# Altium PCB ISL6236 DEMO_PCB.PcbDoc
Units mm, origin at the board's own origin, x right, y up, seen from the top; angles counter-clockwise.
Board outline 50 x 50 mm, 6 copper layers (L1, L2, L3, L4, L5, L6), stack 1.635 mm thick; 41 components, 27 nets, 119 pads, 100 vias.
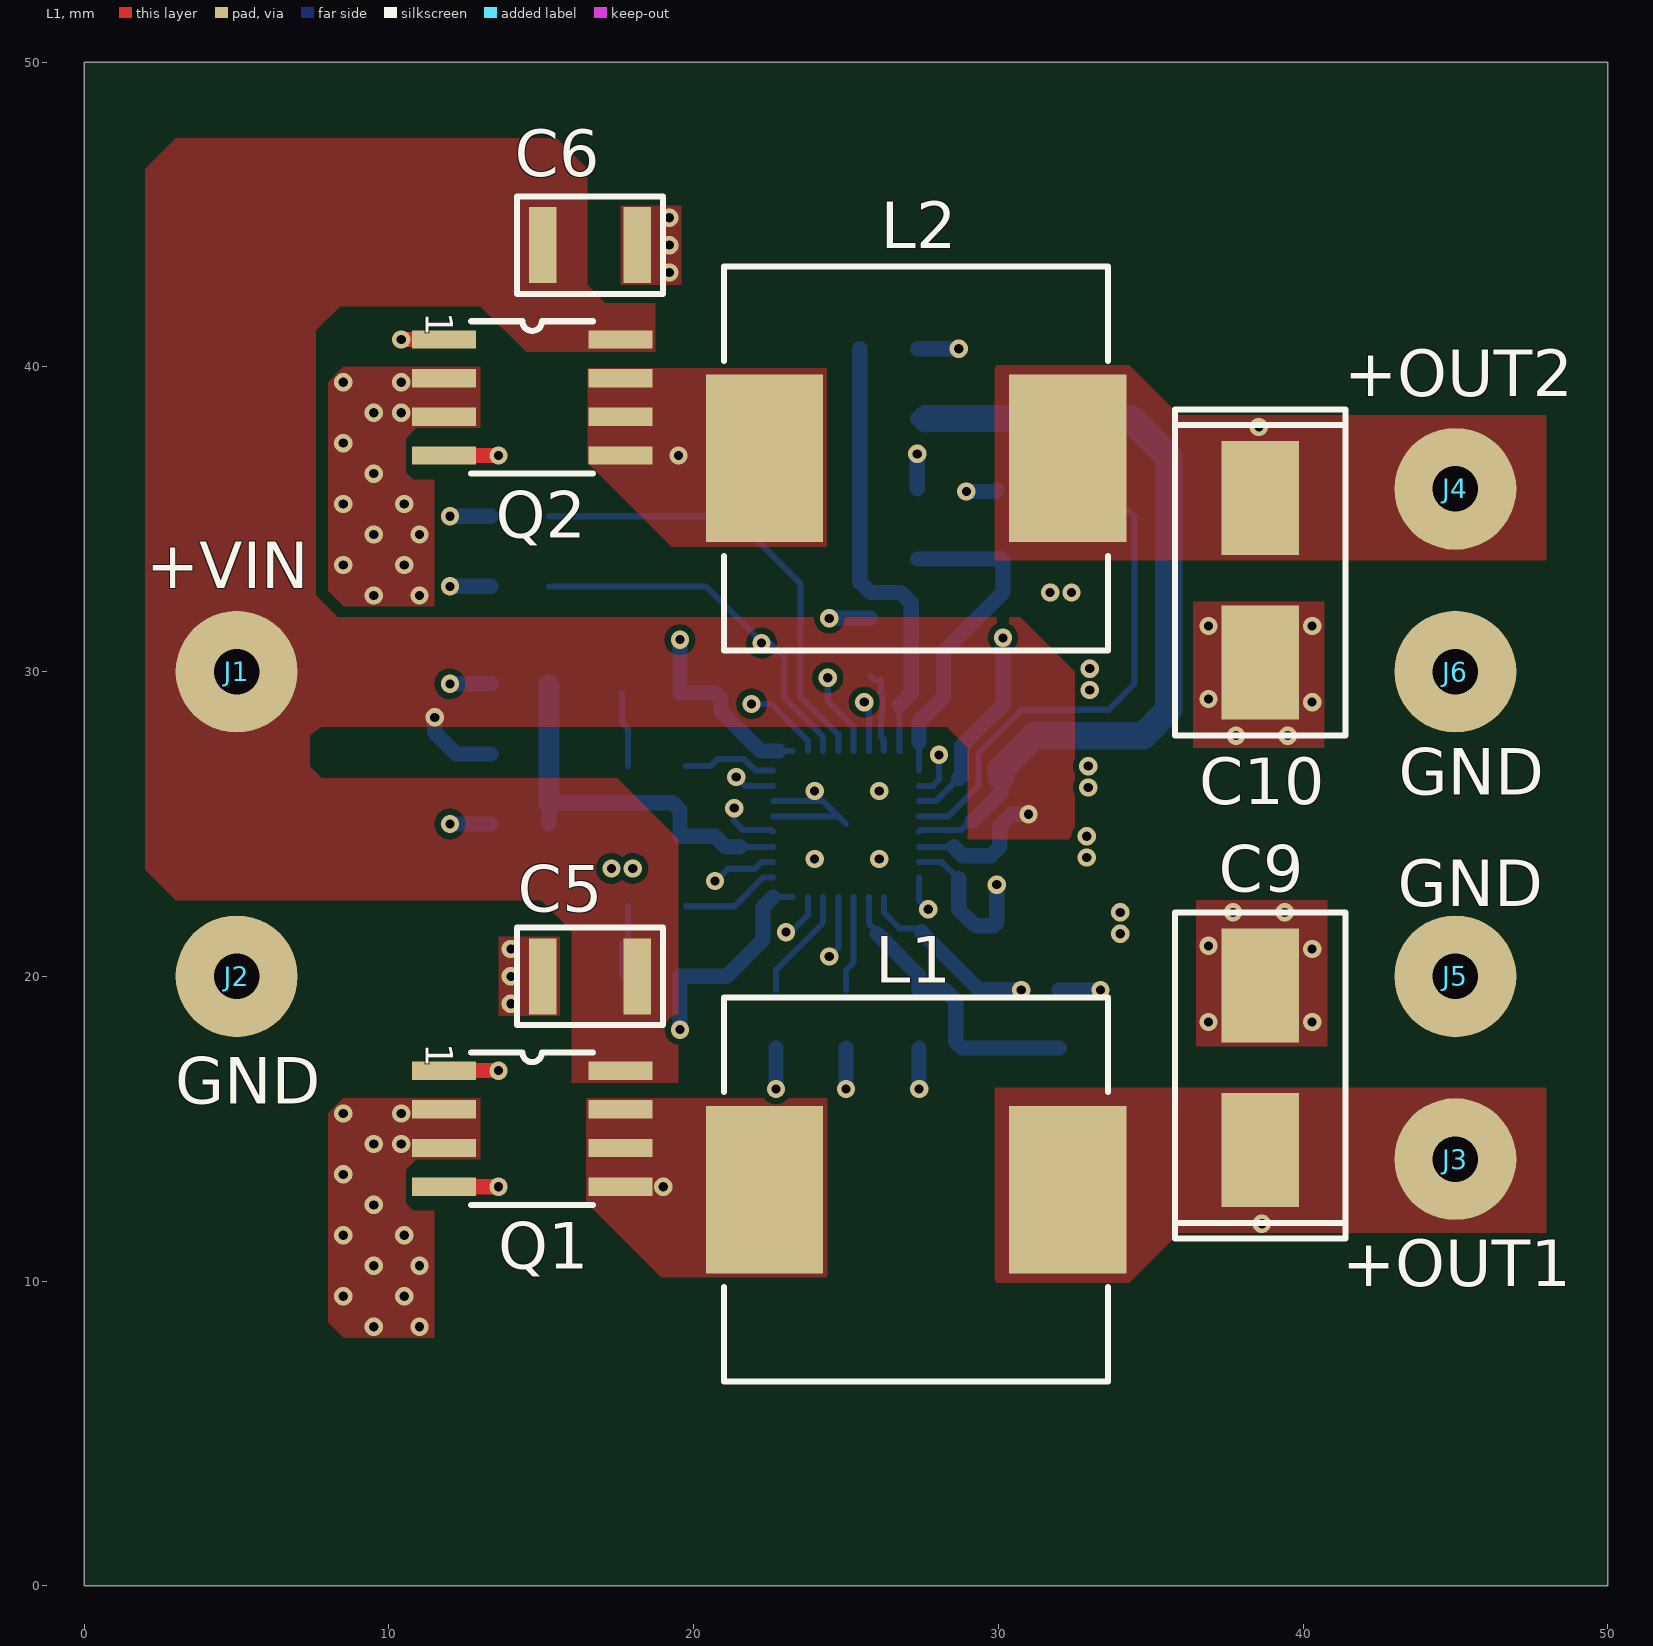
[diagram p0: L1 view]
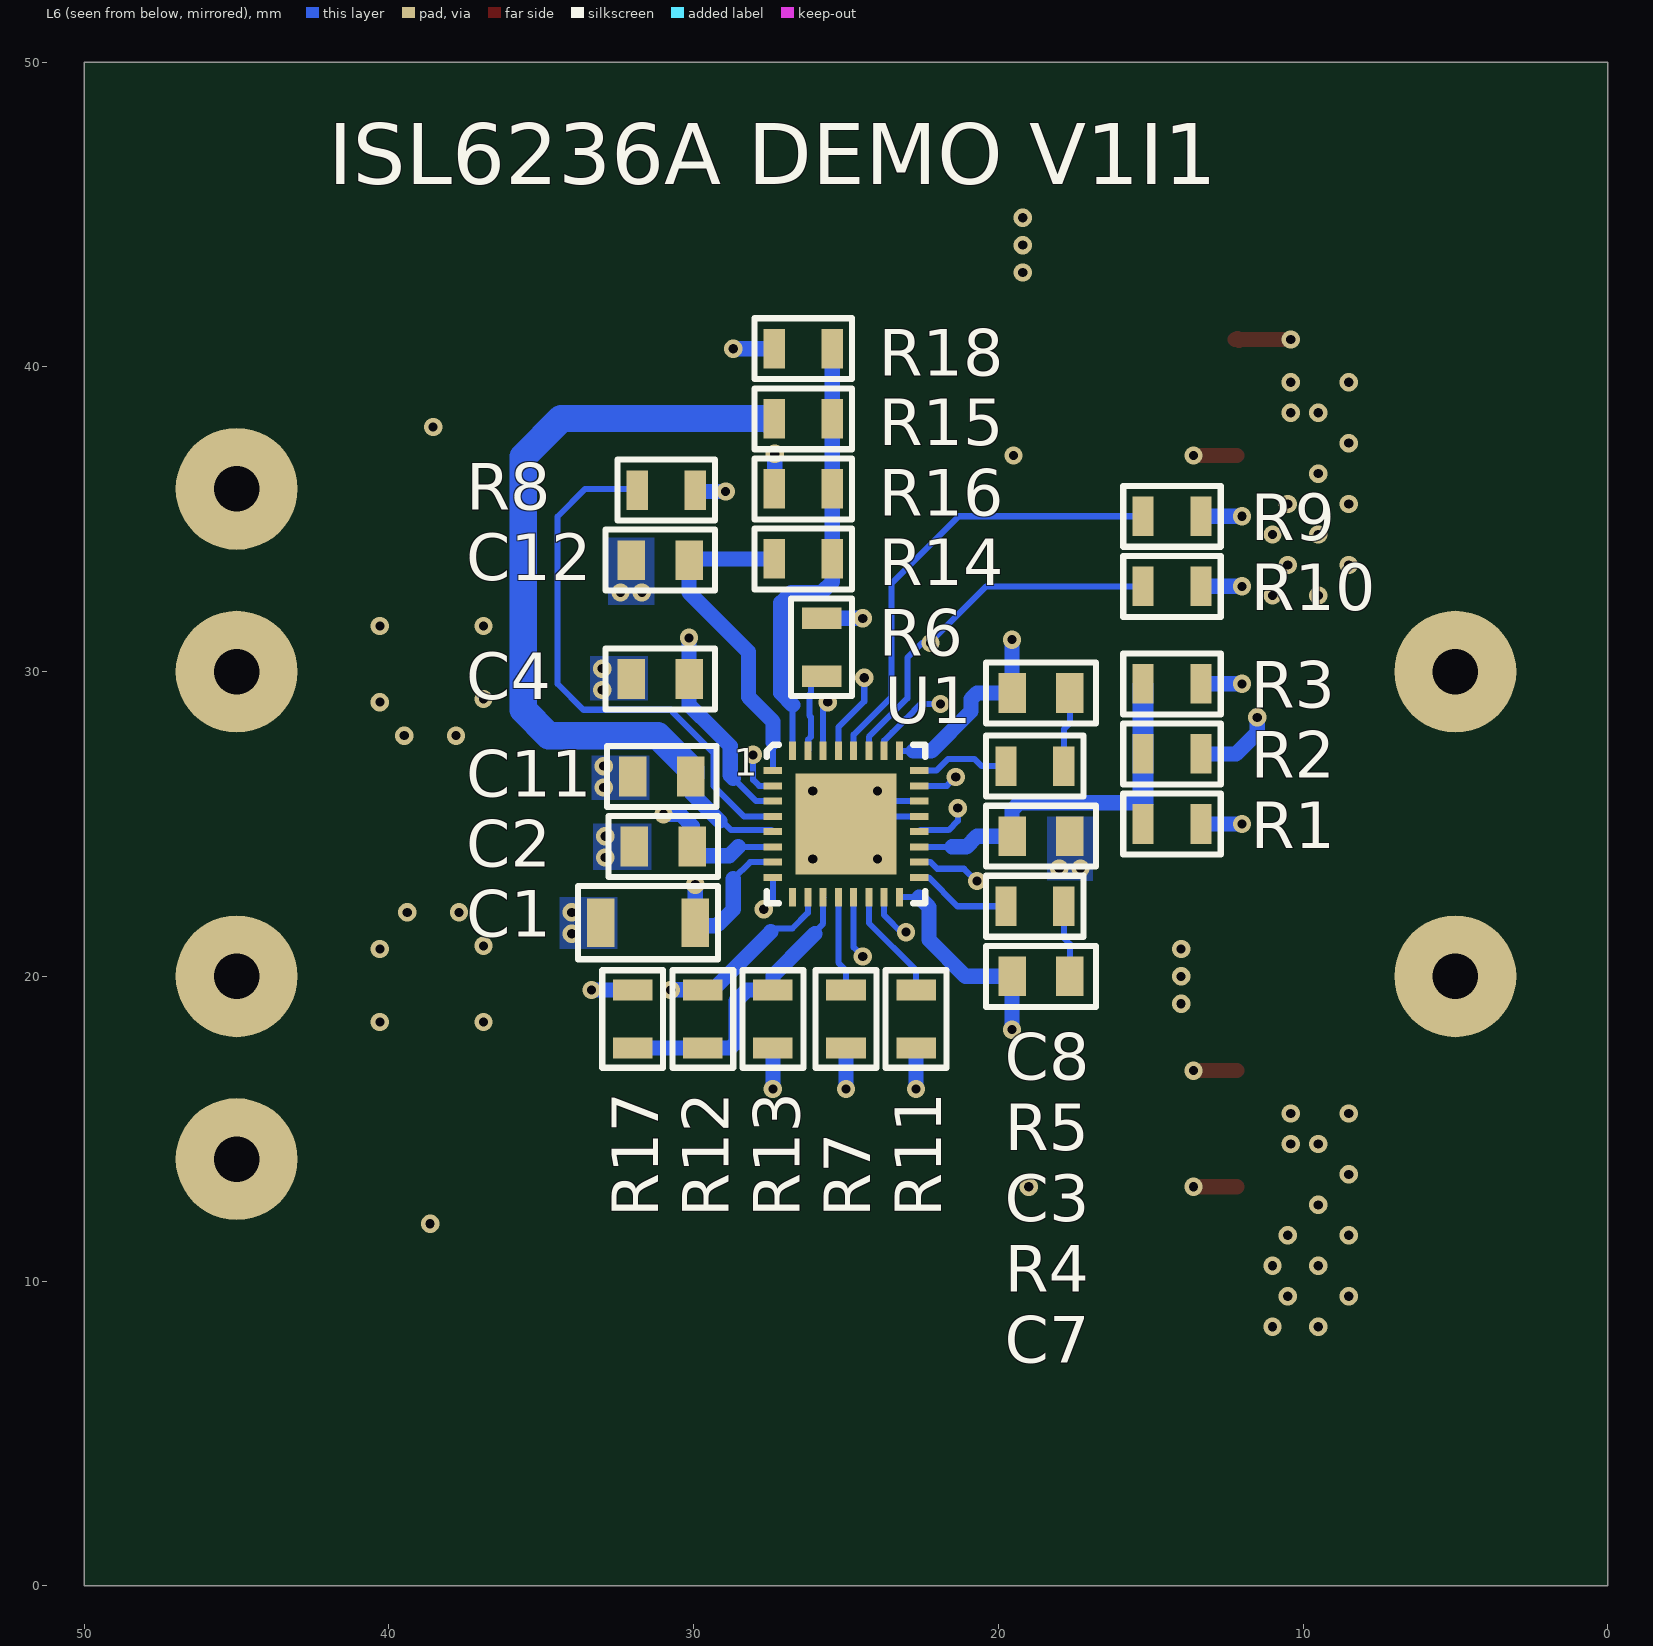
[diagram p1: L6 view, seen from below]
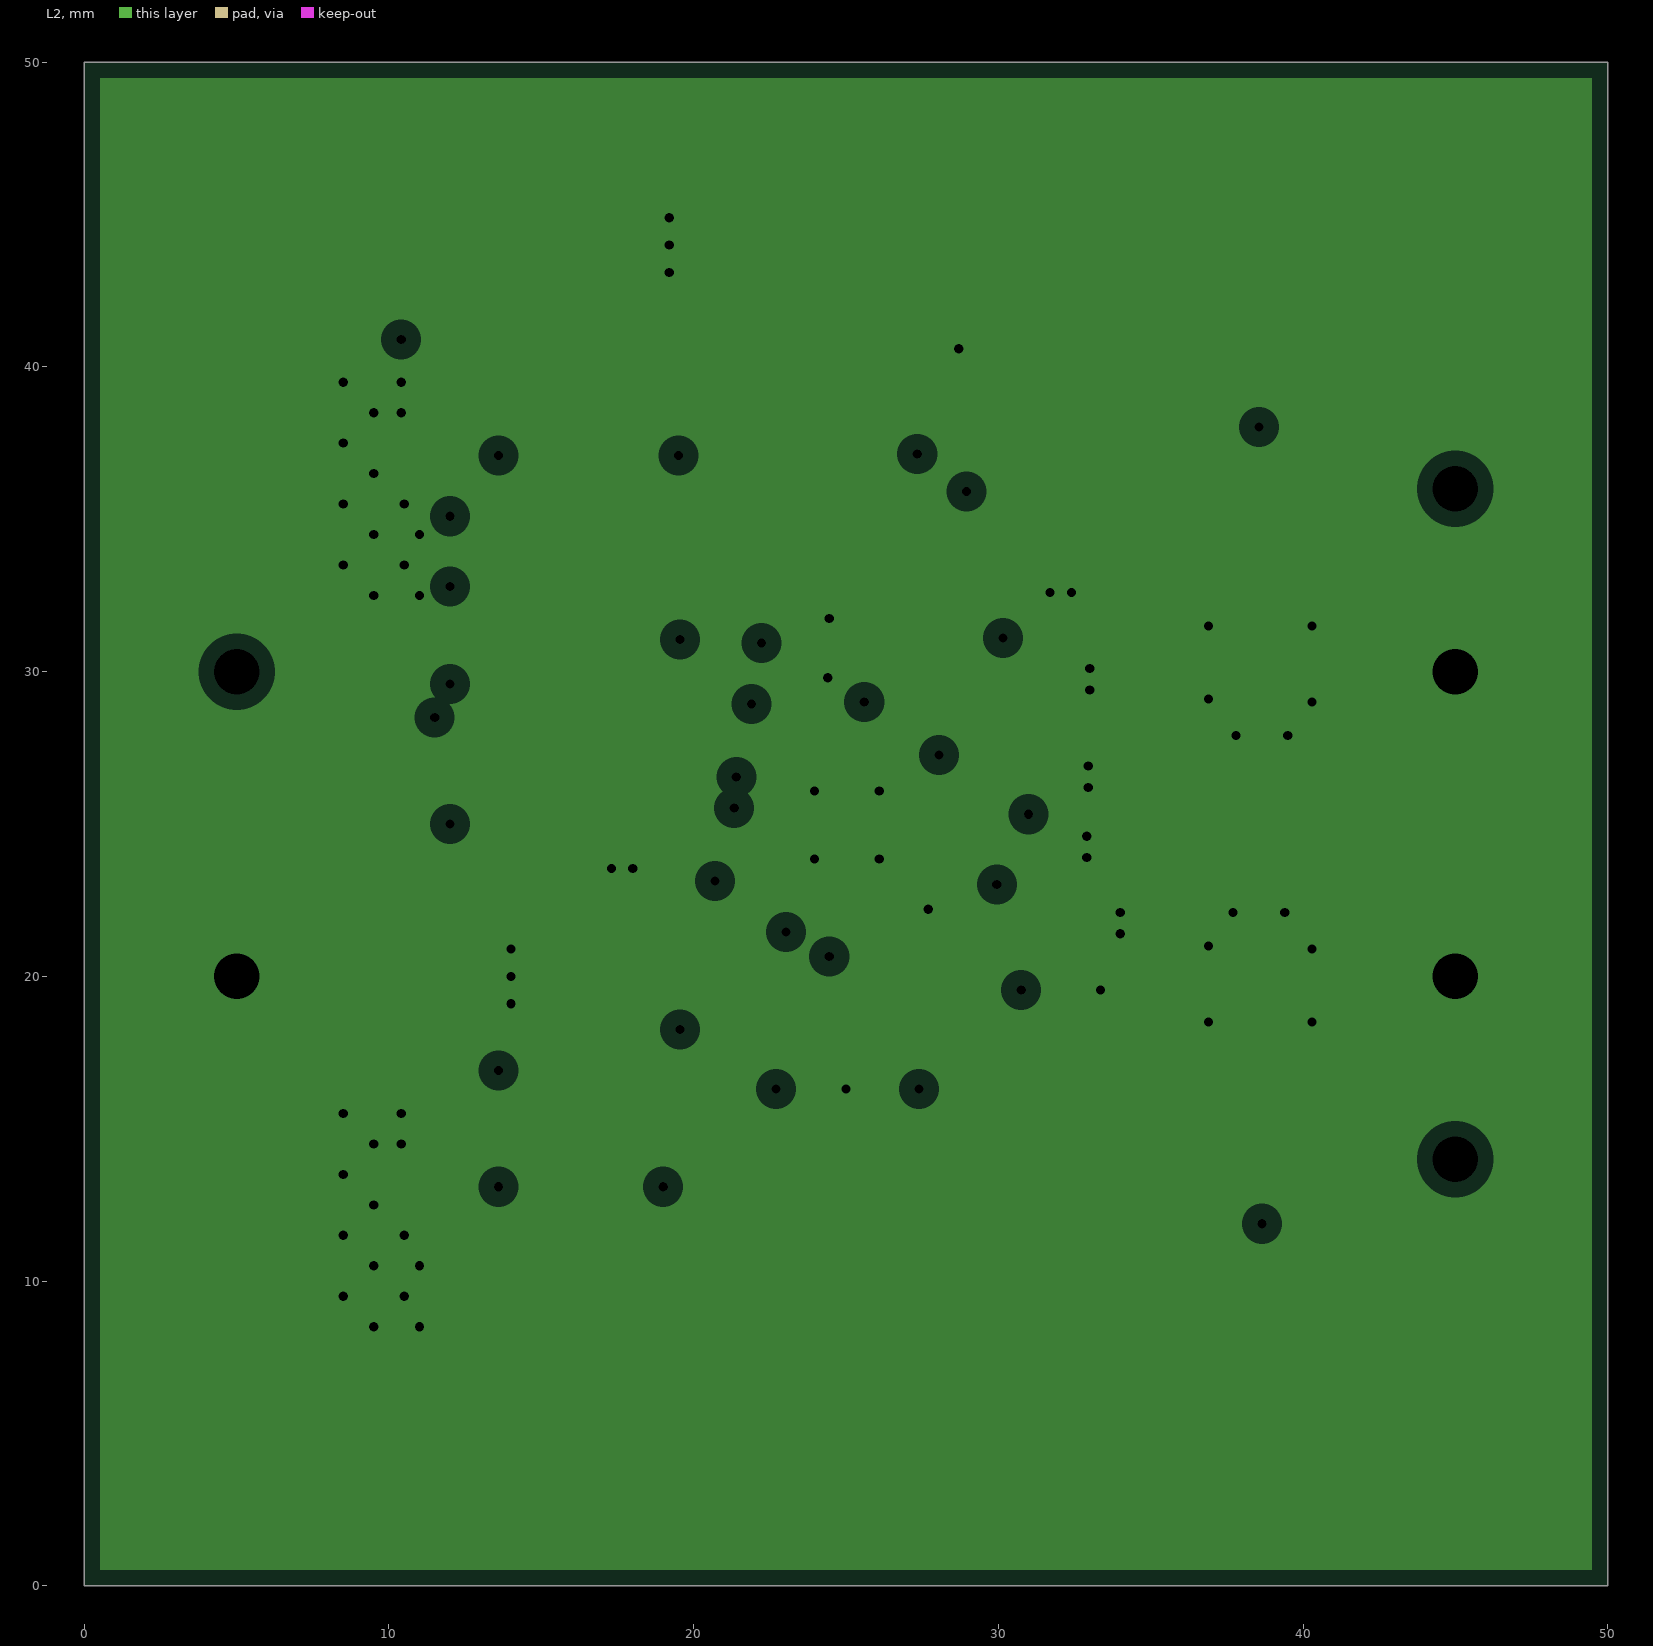
[diagram p2: L2, clearances drawn from the general rule]
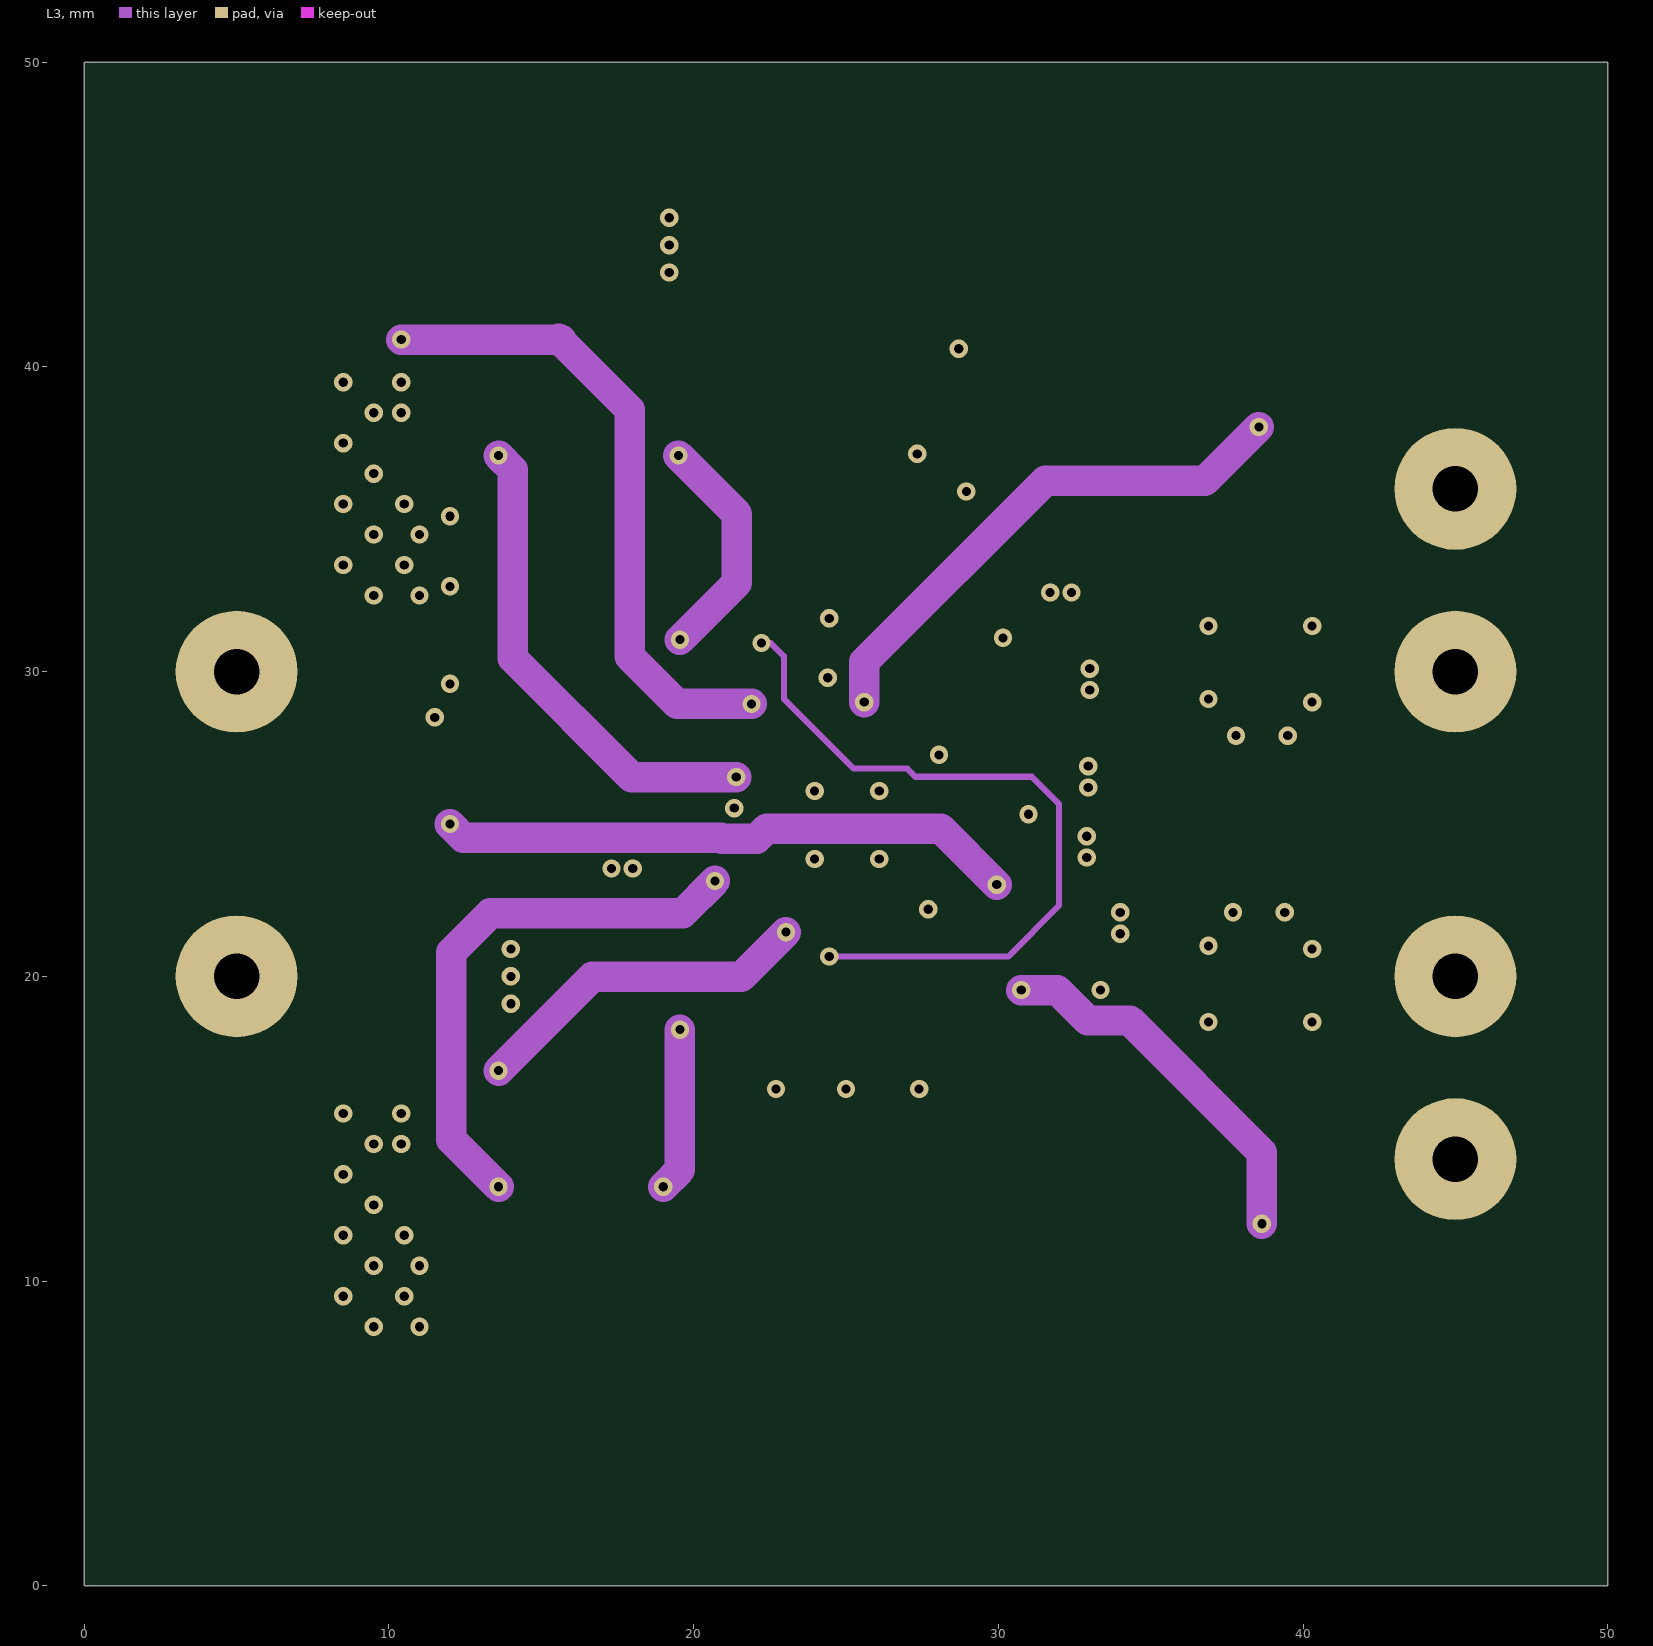
[diagram p3: L3]
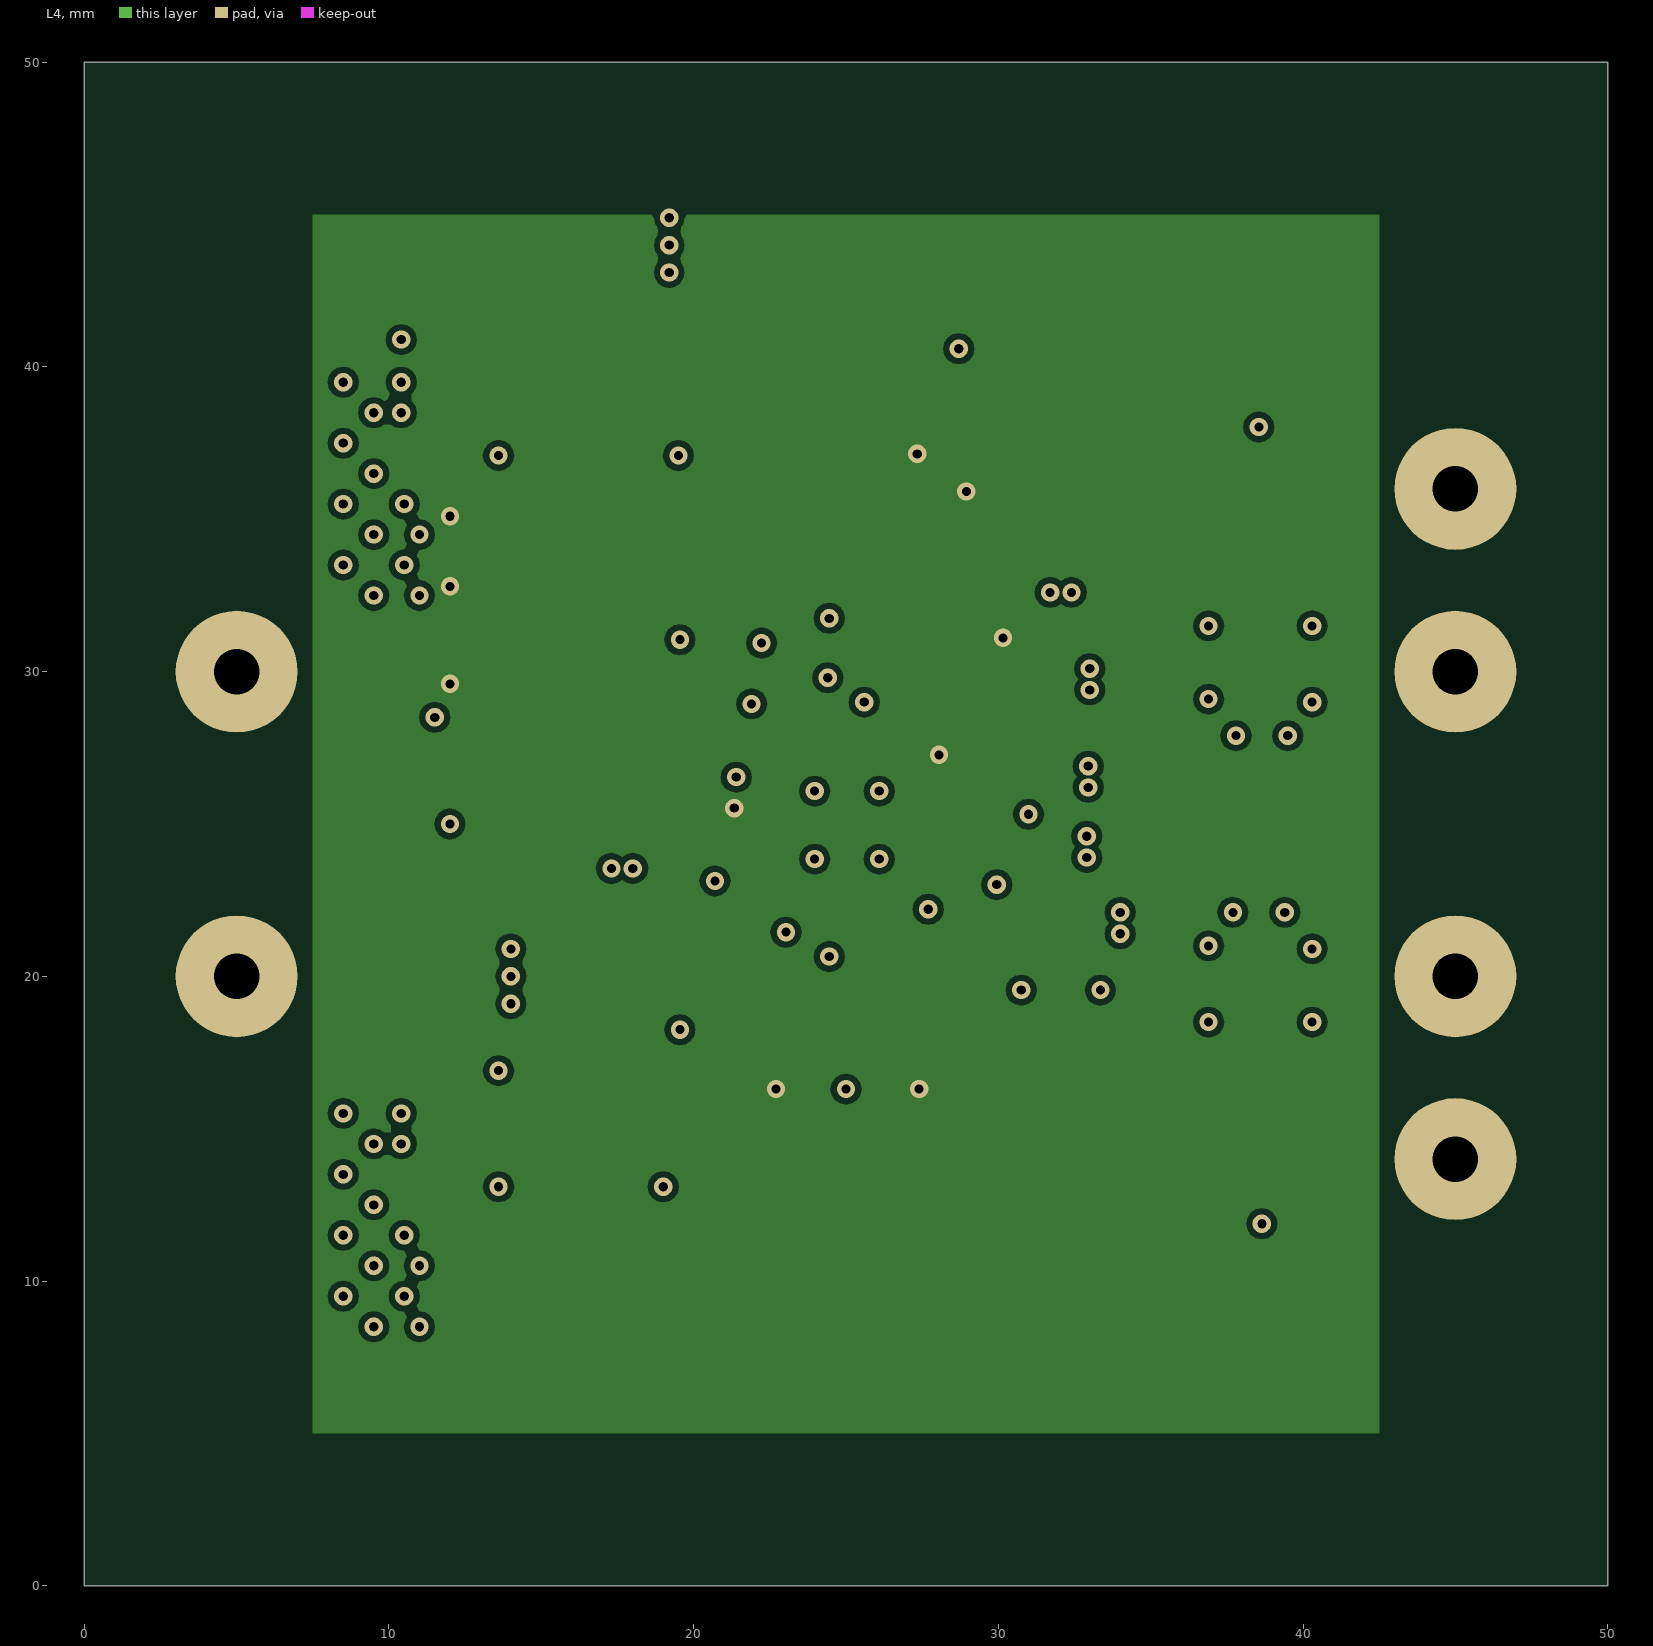
[diagram p4: L4]
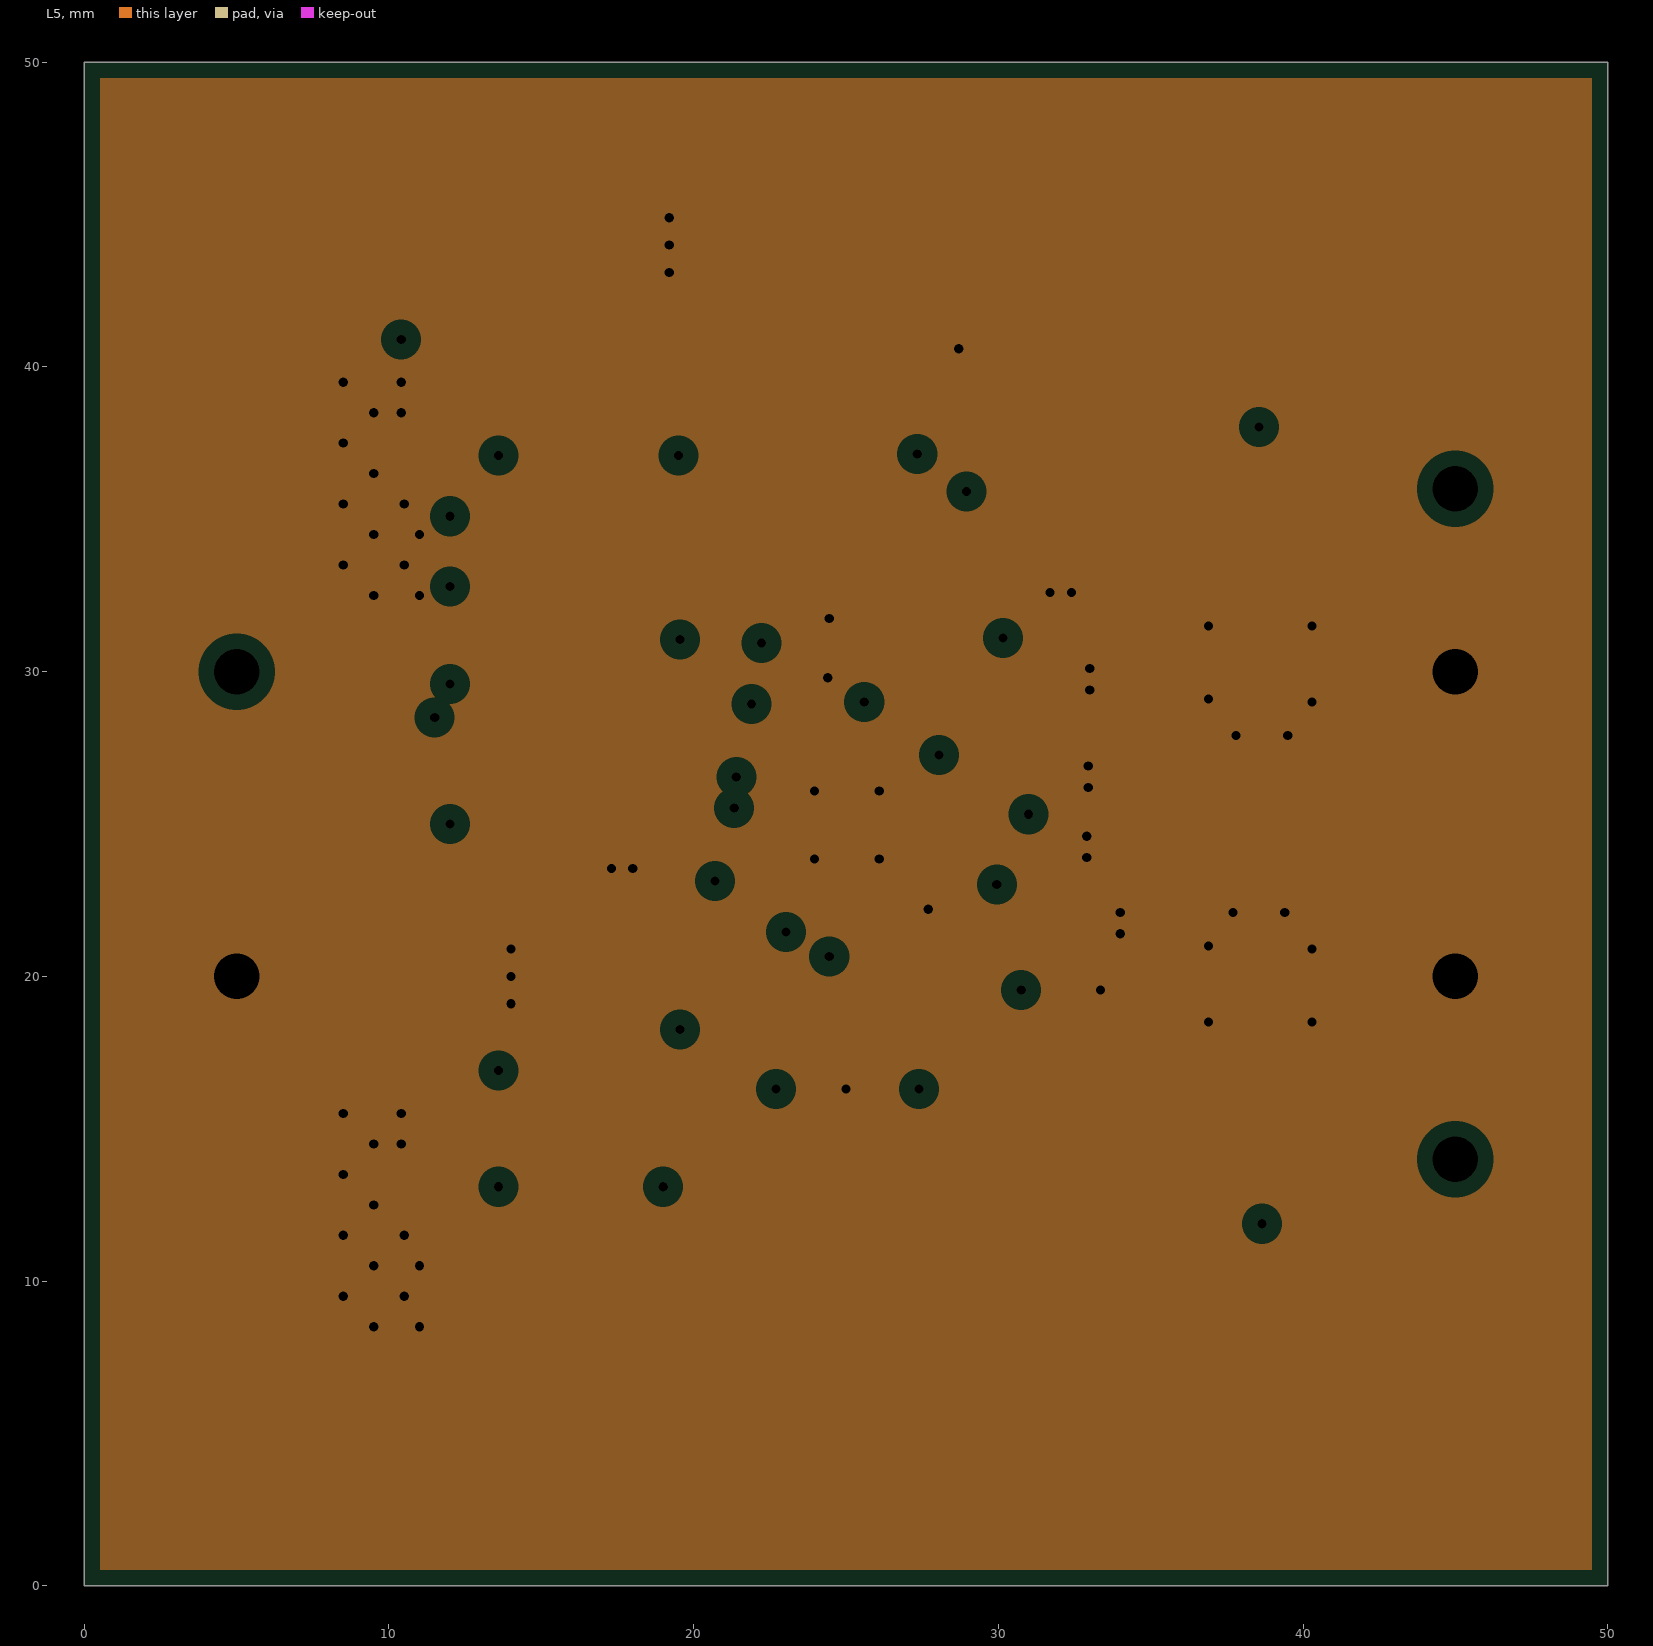
[diagram p5: L5, clearances drawn from the general rule]

## Layer stack, top to bottom
Top Solder: solder mask 0.0102, Solder Resist, Dk 3.5
L1: signal copper 0.035
Dielectric 1: core 0.26, FR-4, Dk 4.2
L2: plane copper 0.035, net GND
Dielectric 3: prepreg 0.36, Dk 4.2
L3: signal copper 0.035
Dielectric 4: core 0.185, Dk 4.2
L4: signal copper 0.035
Dielectric 5: prepreg 0.36, Dk 4.2
L5: plane copper 0.035, net GND
Dielectric 2: core 0.26, Dk 4.2
L6: signal copper 0.035
Bottom Solder: solder mask 0.0102, Solder Resist, Dk 3.5

## Board outline
0,0 50,0 50,50 0,50

## Design rules (kind name [scope] priority, off if disabled: settings)
Clearance [All] p1: gap=0.2 ignorepadtopadclearanceinfootprint=FALSE
ComponentClearance [All] p1: gap=0.099 collisioncheckmode=3 verticalgap=0.099 showdistances=FALSE
MinimumSolderMaskSliver [All] p1: minsoldermaskwidth=0.1
PlaneClearance [All] p1: clearance=0.508
PlaneConnect [All] p1: pad.planeconnectstyle=Relief pad.reliefexpansion=0.508 pad.reliefentries=4 pad.reliefconductorwidth=1 pad.reliefairgap=0.5 via.planeconnectstyle=Direct via.reliefexpansion=0.508 via.reliefentries=4 via.reliefconductorwidth=0.254 via.reliefairgap=0.254
PolygonConnect [All] p1: connectstyle=Direct reliefconductorwidth=0.254 reliefentries=4 polygonreliefangle="90 Angle" airgapwidth=0.254
RoutingVias [All] p1: holewidth=0.3 width=0.6 viastyle="Through Hole" minholewidth=0.3 minwidth=0.6 maxholewidth=0.3 maxwidth=0.6
SilkToSolderMaskClearance [IsPad] p1: minsilkscreentomaskgap=0.1 clearancetoexposedcopper=TRUE
SolderMaskExpansion [All] p1: expansion=0.102 istentingtop=FALSE
Width [All] p1: maxlimit=10 minlimit=0.2 preferedwidth=0.2
25 further rules are at their usual default settings.

## Components (designator, comment, footprint, x,y, rotation, side; value= is the part's Value field where it differs from the comment)
C1 "4u7,50V" C1206 31.5,21.76 r180 bottom
C2 "1uF,50V" C0805 31,24.26 r180 bottom
C3 "1uF,50V" C0805 18.6,24.6 r0 bottom
C4 "1uF,50V" C0805 31.1,29.76 r180 bottom
C5 "10uF,35V" C1210 16.6,20 r0 top
C6 "10uF,35V" C1210 16.6,44 r180 top
C7 "100nF" C0805 18.6,20 r180 bottom
C8 "220nF" C0805 18.6,29.3 r0 bottom
C9 "330uF,10V" 7343-43 38.6,17 r90 top
C10 "330uF,10V" 7343-43 38.6,33 r270 top
C11 "10nF" C0805 31.05,26.56 r0 bottom
C12 "100nF" C0805 31.1,33.66 r0 bottom
J1 "4MMx1.5MM" PAD_WITH_HOLE_4MMx1MM5 5,30 r0 top
J2 "4MMx1.5MM" PAD_WITH_HOLE_4MMx1MM5 5,20 r0 top
J3 "4MMx1.5MM" PAD_WITH_HOLE_4MMx1MM5 45,14 r0 top
J4 "4MMx1.5MM" PAD_WITH_HOLE_4MMx1MM5 45,36 r0 top
J5 "4MMx1.5MM" PAD_WITH_HOLE_4MMx1MM5 45,20 r0 top
J6 "4MMx1.5MM" PAD_WITH_HOLE_4MMx1MM5 45,30 r0 top
L1 "3u3,DR125-3R3-R" DR125 27.3,13 r180 top
L2 "2U2,DR125-2R2-R" DR125 27.3,37 r0 top
Q1 "SI4816BDY-T1-GE3" SO-8 14.7,15 r0 top
Q2 "SI4816BDY-T1-GE3" SO-8 14.7,39 r0 top
R1 "0R" R0805 14.3,25 r180 bottom
R2 "0R" R0805 14.3,27.3 r0 bottom
R3 "10R" R0805 14.3,29.6 r0 bottom
R4 "1R" R0805 18.8,22.3 r0 bottom
R5 "1R" R0805 18.8,26.9 r180 bottom
R6 "200K" R0805 25.8,30.8 r90 bottom
R7 "200K" R0805 25,18.6 r90 bottom
R8 "10K" R0805 30.9,35.96 r180 bottom
R9 "200K" R0805 14.3,35.1 r180 bottom
R10 "200K" R0805 14.3,32.8 r180 bottom
R11 "10K" R0805 22.7,18.6 r270 bottom
R12 "DNF" R0805 29.7,18.6 r90 bottom
R13 "0R" R0805 27.4,18.6 r270 bottom
R14 "DNF" R0805 26.4,33.7 r0 bottom
R15 "0R" R0805 26.4,38.3 r0 bottom
R16 "DNF" R0805 26.4,36 r180 bottom
R17 "DNF" R0805 32,18.6 r270 bottom
R18 "DNF" R0805 26.4,40.6 r0 bottom
U1 "ISL6236AIRZ" L32.5x5B 25,25 r180 bottom

## Footprints (in the part's own frame and the unit in brackets; to place one, negate y for a bottom-side part, rotate by r counter-clockwise, add the part's x,y. Pads: shape width x height; smd on the part's side, far side on the other; paste and mask are expansions set on the pad)
7343-43 [mm]
  rect 3.75x2.55 smd: 1(-2.7,0) 2(2.7,0)
  silkscreen extent -5.6,-2.8 5.1,2.8
C0805 [mm]
  rect 0.9x1.3 smd: 1(-0.95,0) 2(0.95,0)
  silkscreen extent -1.8,-1 1.8,1
C1206 [mm]
  rect 0.9x1.6 smd: 1(-1.55,0) 2(1.55,0)
  silkscreen extent -2.3,-1.2 2.3,1.2
C1210 [mm]
  rect 0.9x2.5 smd: 1(-1.55,0) 2(1.55,0)
  silkscreen extent -2.4,-1.6 2.4,1.6
DR125 [mm]
  rect 3.85x5.5 smd: 1(-4.975,0) 2(4.975,0)
  silkscreen extent -6.3,-6.3 6.3,6.3
L32.5x5B [mm]
  rect 0.6x0.23 smd mask+0.051: 1(-2.4,1.75) 2(-2.4,1.25) 3(-2.4,0.75) 4(-2.4,0.25) 5(-2.4,-0.25) 6(-2.4,-0.75) 7(-2.4,-1.25) 8(-2.4,-1.75) 17(2.4,-1.75) 18(2.4,-1.25) 19(2.4,-0.75) 20(2.4,-0.25) 21(2.4,0.25) 22(2.4,0.75) 23(2.4,1.25) 24(2.4,1.75)
  rect 0.23x0.6 smd mask+0.051: 9(-1.75,-2.4) 10(-1.25,-2.4) 11(-0.75,-2.4) 12(-0.25,-2.4) 13(0.25,-2.4) 14(0.75,-2.4) 15(1.25,-2.4) 16(1.75,-2.4) 25(1.75,2.4) 26(1.25,2.4) 27(0.75,2.4) 28(0.25,2.4) 29(-0.25,2.4) 30(-0.75,2.4) 31(-1.25,2.4) 32(-1.75,2.4)
  rect 3.3x3.3 smd mask+0.051: 33(0,0)
  silkscreen extent -2.6,-2.6 2.6,2.6
PAD_WITH_HOLE_4MMx1MM5 [mm]
  round 4 hole 1.5: 1(0,0)
R0805 [mm]
  rect 0.7x1.3 smd: 1(-0.95,0) 2(0.95,0)
  silkscreen extent -1.6,-1 1.6,1
SO-8 [mm]
  rect 2.1x0.6 smd: 1(-2.9,1.905) 2(-2.9,0.635) 3(-2.9,-0.635) 4(-2.9,-1.905) 5(2.9,-1.905) 6(2.9,-0.635) 7(2.9,0.635) 8(2.9,1.905)
  silkscreen extent -2,-2.5 2,2.5

## Part data
C1: library part C3216X5R1H475K160AB, "C Series 1206 4.7 uF 50 V ±10 % Tolerance X5R SMT Multilayer Ceramic Capacitor", Capacitance=4.7uF, Case/Package=1206, Case Code (Metric)=3216, Dielectric=X5R, Dielectric Material=Ceramic, Manufacturer=TDK, Max Operating Temperature=85°C, Min Operating Temperature=-55°C, Package Quantity=1, Supplier Part Number 1=445-5994-6-ND, Tolerance=10%, Voltage Rating=50V, Case Code (Imperial)=1206, ComponentLink1Description=http://www.mouser.com/ds/2/400/lcc_commercial_general_en-837201.pdf?src-supplier=Mouser, ComponentLink1URL=http://www.mouser.com/ds/2/400/lcc_commercial_general_en-837201.pdf?src-supplier=Mouser, ComponentLink2Description=https://product.tdk.com/en/products/common/pdf/mlcc_partnumber_description.pdf?src-supplier=Digi-Key, ComponentLink2URL=https://product.tdk.com/en/products/common/pdf/mlcc_partnumber_description.pdf?src-supplier=Digi-Key, ComponentLink3Description=https://product.tdk.com/info/en/documents/chara_sheet/C3216X5R1H475K160AB.pdf?src-supplier=Digi-Key, ComponentLink3URL=https://product.tdk.com/info/en/documents/chara_sheet/C3216X5R1H475K160AB.pdf?src-supplier=Digi-Key, Composition=Ceramic, Depth=1.6mm, Height=1.6mm, Lead Free="Lead Free", Length=3.2mm, Manufacturer Part Number=C3216X5R1H475K160AB, Mount="Surface Mount", Packaging="Tape and Reel", Pricing 1="1=0.9, 10=0.664, 100=0.4554, 500=0.36052, 1000=0.3036 (USD)", Stock 1=2272, Supplier 1=Digi-Key, Termination=SMD/SMT, Thickness=0.071inch, Voltage Rating (DC)=50V, Weight=0.000571oz, Width=1.6mm
C2 C3 C4: library part C0805C105K5RACTU, "CAP CER 1UF 50V X7R 0805", Capacitance=1uF, Case/Package=0805, Case Code (Metric)=2012, Dielectric=X7R, Dielectric Material=Ceramic, Manufacturer=KEMET, Max Operating Temperature=125°C, Min Operating Temperature=-55°C, Package Quantity=1, Supplier Part Number 1=399-7409-6-ND, Tolerance=10%, Voltage=50V, Case Code (Imperial)=0805, ComponentLink1Description=http://www.farnell.com/datasheets/2740426.pdf?src-supplier=Element14, ComponentLink1URL=http://www.farnell.com/datasheets/2740426.pdf?src-supplier=Element14, ComponentLink2Description=http://www.mouser.com/ds/2/212/KEM_C1002_X7R_SMD-1102033.pdf?src-supplier=Mouser, ComponentLink2URL=http://www.mouser.com/ds/2/212/KEM_C1002_X7R_SMD-1102033.pdf?src-supplier=Mouser, Contact Plating=Tin,Matte, Depth=1.25mm, Height=1.25mm, Length=2mm, Manufacturer Part Number=C0805C105K5RACTU, Mount="Surface Mount,PCB", Packaging="Tape and Reel", Pricing 1="1=0.4, 10=0.277, 100=0.1662, 500=0.12466, 1000=0.10527 (USD)", REACH SVHC="No SVHC", Stock 1=193296, Supplier 1=Digi-Key, Termination=SMD/SMT, Thickness=0.055inch, Voltage Rating=50V, Voltage Rating (DC)=50V, Width=0.049inch
C5 C6: library part C1210C106K6PACTU, "KEMET - C1210C106K6PACTU - SMD Multilayer Ceramic Capacitor, 10 µF, 35 V, 1210 [3225 Metric], ± 10%, X5R, C Series KEMET", Capacitance=10uF, Case/Package=1210, Case Code (Metric)=3225, Dielectric=X5R, Dielectric Material=Ceramic, Manufacturer=KEMET, Max Operating Temperature=85°C, Min Operating Temperature=-55°C, Supplier Part Number 1=399-12070-6-ND, Tolerance=10%, Voltage=35V, Case Code (Imperial)=1210, ComponentLink1Description=http://www.farnell.com/datasheets/2741192.pdf?src-supplier=Farnell, ComponentLink1URL=http://www.farnell.com/datasheets/2741192.pdf?src-supplier=Farnell, ComponentLink2Description=https://api.kemet.com/component-edge/download/datasheet/C1210C106K6PAC7800.pdf?src-supplier=Digi-Key, ComponentLink2URL=https://api.kemet.com/component-edge/download/datasheet/C1210C106K6PAC7800.pdf?src-supplier=Digi-Key, ComponentLink3Description=http://www.kemet.com/docfinder?Partnumber=C1210C106K6PAC7800&src-supplier=Digi-Key, ComponentLink3URL=http://www.kemet.com/docfinder?Partnumber=C1210C106K6PAC7800&src-supplier=Digi-Key, ComponentLink4Description=http://www.alliedelec.com/m/d/f3c02ddb98afa3dd1adcb801109671e9.pdf?src-supplier=Allied+Electronics, ComponentLink4URL=http://www.alliedelec.com/m/d/f3c02ddb98afa3dd1adcb801109671e9.pdf?src-supplier=Allied+Electronics, ComponentLink5Description=http://www.farnell.com/datasheets/2741192.pdf?src-supplier=Newark, ComponentLink5URL=http://www.farnell.com/datasheets/2741192.pdf?src-supplier=Newark, Depth=2.5mm, Dissipation Factor=2.5%, Height=1.9mm, Lead Free="Lead Free", Length=0.126inch, Manufacturer Part Number=C1210C106K6PACTU, Mount="Surface Mount", Packaging="Tape and Reel", Pricing 1="1=0.82, 10=0.603, 100=0.4138, 500=0.3276, 1000=0.27588 (USD)", Stock 1=40357, Supplier 1=Digi-Key, Termination=Solder, Thickness=0.083inch, Voltage Rating=35V, Voltage Rating (DC)=35V, Width=0.098inch
C7 C12: library part C0805C104K5RACTU, "Cap Ceramic 0.1uF 50V X7R 10% SMD 2.0 x 1.2 mm 125 C Paper T/R", Case/Package=0805, Case Code (Metric)=2012, Dielectric=X7R, Dielectric Material=Ceramic, Manufacturer=KEMET, Max Operating Temperature=125°C, Min Operating Temperature=-55°C, Package Quantity=4000, Supplier Part Number 1=399-1170-6-ND, Tolerance=10%, Voltage=500V, Voltage Rating=50V, Capacitance=100nF, Case Code (Imperial)=0805, ComponentLink1Description=http://www.alliedelec.com/m/d/9bfe7773041ffe9d406e68bc7b377fdd.pdf?src-supplier=Allied+Electronics, ComponentLink1URL=http://www.alliedelec.com/m/d/9bfe7773041ffe9d406e68bc7b377fdd.pdf?src-supplier=Allied+Electronics, ComponentLink2Description=http://www.farnell.com/datasheets/2740684.pdf?src-supplier=Element14, ComponentLink2URL=http://www.farnell.com/datasheets/2740684.pdf?src-supplier=Element14, ComponentLink3Description=https://www.distrelec.biz/Web/Downloads/_t/ds/KEM_C1002_X7R_SMD_eng_tds.pdf?mime=application%2Fpdf&src-supplier=Distrelec, ComponentLink3URL=https://www.distrelec.biz/Web/Downloads/_t/ds/KEM_C1002_X7R_SMD_eng_tds.pdf?mime=application%2Fpdf&src-supplier=Distrelec, Contact Plating=Tin,Matte, Depth=1.25mm, Height=0.9mm, Lead Pitch=0.75mm, Length=2mm, Manufacturer Part Number=C0805C104K5RACTU, Mount="Surface Mount,PCB", Number of Pins=2, Packaging="Tape and Reel", Pricing 1="1=0.17, 10=0.121, 100=0.0567, 500=0.03976, 1000=0.03291 (USD)", Radiation Hardening=No, REACH SVHC="No SVHC", Stock 1=1647254, Supplier 1=Digi-Key, Termination=SMD/SMT, Thickness=0.035inch, Voltage Rating (DC)=50V, Width=1.2mm
C8: library part C0805C224K5RACTU, "CAP CER 0.22UF 50V X7R 0805", Case/Package=0805, Case Code (Metric)=2012, Dielectric=X7R, Dielectric Material=Ceramic, Manufacturer=KEMET, Max Operating Temperature=125°C, Min Operating Temperature=-55°C, Package Quantity=1, Supplier Part Number 1=399-3491-6-ND, Tolerance=10%, Voltage=50V, Capacitance=220nF, Case Code (Imperial)=0805, ComponentLink1Description=http://www.kemet.com/kemet/web/homepage/kechome.nsf/vapubfiles/KEM_C1002_X7R_SMD.pdf/$file/KEM_C1002_X7R_SMD.pdf?src-supplier=Element14, ComponentLink1URL=http://www.kemet.com/kemet/web/homepage/kechome.nsf/vapubfiles/KEM_C1002_X7R_SMD.pdf/$file/KEM_C1002_X7R_SMD.pdf?src-supplier=Element14, ComponentLink2Description=https://www.verical.com/server-webapp/html/getDatasheet?partID=304413&src-supplier=Verical, ComponentLink2URL=https://www.verical.com/server-webapp/html/getDatasheet?partID=304413&src-supplier=Verical, ComponentLink3Description=http://www.farnell.com/datasheets/2739716.pdf?src-supplier=Element14, ComponentLink3URL=http://www.farnell.com/datasheets/2739716.pdf?src-supplier=Element14, ComponentLink4Description=https://search.kemet.com/component-edge/download/datasheet/C0805C224K5RACTU.pdf?src-supplier=Allied+Electronics, ComponentLink4URL=https://search.kemet.com/component-edge/download/datasheet/C0805C224K5RACTU.pdf?src-supplier=Allied+Electronics, Depth=1.25mm, Dissipation Factor=2.5%, Height=1.1mm, Lead Pitch=0.75mm, Length=2mm, Manufacturer Part Number=C0805C224K5RACTU, Mount="Surface Mount,PCB", Packaging="Tape and Reel", Pricing 1="1=0.2, 10=0.139, 100=0.0655, 500=0.04592, 1000=0.03802 (USD)", Radiation Hardening=No, REACH SVHC="No SVHC", Stock 1=1352987, Supplier 1=Digi-Key, Termination=SMD/SMT, Thickness=0.055inch, Voltage Rating=50V, Voltage Rating (DC)=50V, Width=0.049inch
C9 C10: library part T530X337M010ATE004, "Tantalum Capacitors - Polymer SMD 330uF 10volts 20%", Capacitance=330uF, Case/Package=2917, Case Code (Metric)=7343, ESR (Equivalent Series Resistance)=4mR, Leakage Current=330uA, Manufacturer=KEMET, Max Operating Temperature=125°C, Min Operating Temperature=-55°C, Package Quantity=500, Ripple Current=8.2A, Supplier Part Number 1=399-10378-6-ND, Tolerance=20%, Voltage=10V, Case Code (Imperial)=2917, ComponentLink1Description=https://www.alliedelec.com/m/d/c2b5846d1b4015924ec44504ba06510b.pdf?src-supplier=Allied+Electronics, ComponentLink1URL=https://www.alliedelec.com/m/d/c2b5846d1b4015924ec44504ba06510b.pdf?src-supplier=Allied+Electronics, ComponentLink2Description=http://uk.rs-online.com/webdocs/1529/0900766b815291cb.pdf?src-supplier=RSComponents, ComponentLink2URL=http://uk.rs-online.com/webdocs/1529/0900766b815291cb.pdf?src-supplier=RSComponents, Depth=4.3mm, Dissipation Factor=8%, Features="General Purpose", Height=4mm, Height - Seated (Max)=0.169inch, Length=7.3mm, Life (Hours)=2000Hour, Manufacturer Part Number=T530X337M010ATE004, Mount="Surface Mount,PCB", Packaging="Tape and Reel", Polarity=Polar, Pricing 1="1=6.86, 10=6.095, 100=4.876 (USD)", REACH SVHC="No SVHC", Stock 1=3645, Supplier 1=Digi-Key, Termination=SMD/SMT, Voltage Rating=10V, Voltage Rating (DC)=10V, Width=4.3mm
C11: library part C0805F103K5RACTU, "KEMET - C0805F103K5RACTU - SMD Multilayer Ceramic Capacitor, FO-CAP, 10000 pF, 50 V, 0805 [2012 Metric], ± 10%, X7R", Case/Package=0805, Case Code (Metric)=2012, Dielectric=X7R, Dielectric Material=Ceramic, Manufacturer=KEMET, Max Operating Temperature=125°C, Min Operating Temperature=-55°C, Package Quantity=4000, Supplier Part Number 1=399-5107-6-ND, Tolerance=10%, Voltage=50V, Capacitance=10nF, Case Code (Imperial)=0805, ComponentLink1Description=https://search.kemet.com/component-edge/download/datasheet/C0805F103K5RACTU.pdf?src-supplier=Digi-Key, ComponentLink1URL=https://search.kemet.com/component-edge/download/datasheet/C0805F103K5RACTU.pdf?src-supplier=Digi-Key, ComponentLink2Description=http://www.farnell.com/datasheets/2739722.pdf?src-supplier=Element14, ComponentLink2URL=http://www.farnell.com/datasheets/2739722.pdf?src-supplier=Element14, Depth=1.25mm, Height=0.9mm, Lead Pitch=0.75mm, Length=2mm, Manufacturer Part Number=C0805F103K5RACTU, Mount="Surface Mount", Number of Pins=2, Packaging="Tape and Reel", Pricing 1="1=0.34, 10=0.236, 100=0.1417, 500=0.10624, 1000=0.08972 (USD)", Radiation Hardening=No, REACH SVHC="No SVHC", Stock 1=98475, Supplier 1=Digi-Key, Termination=SMD/SMT, Thickness=0.039inch, Voltage Rating=50V, Voltage Rating (DC)=50V, Width=1.25mm
J1 J2 J3 J4 J5 J6: library part PAD_WITH_HOLE_4MMx1MM5, "Pad with a hole 4mm x 1.5mm"
L1: library part DR125-3R3-R, "COILTRONICS         DR125-3R3-R             Surface Mount Power Inductor, DR Series, 3.3 H, 9.26 A, 12.7 A, Shielded", Case/Package=0125, DC Resistance (DCR)=6.3mR, Inductance=3.3uH, Inductance Tolerance=20%, Manufacturer="Eaton Coiltronics", Max DC Current=12.7A, Max Operating Temperature=125°C, Min Operating Temperature=-40°C, Package Quantity=600, RMS Current (Irms)=9.26A, Self Resonant Frequency=100kHz, Supplier Part Number 1=513-1529-6-ND, ComponentLink1Description=http://www.farnell.com/datasheets/87246.pdf?src-supplier=Element14, ComponentLink1URL=http://www.farnell.com/datasheets/87246.pdf?src-supplier=Element14, Core Material=Ferrite, Depth=12.5mm, Height=6mm, Lead Free="Lead Free", Length=12.5mm, Manufacturer Part Number=DR125-3R3-R, Military Standard=Not, Mount="Surface Mount", Number of Pins=2, Packaging="Tape and Reel", Pricing 1="1=2.03, 10=1.873, 100=1.3113 (USD)", Radiation Hardening=No, REACH SVHC="No SVHC", Saturation Current=12.7A, Shielding=Shielded, Stock 1=1635, Supplier 1=Digi-Key, Termination=SMD/SMT, Test Frequency=100kHz, Tolerance=20%, Weight=0.144oz, Width=12.5mm
L2: library part DR125-2R2-R, "FIXED IND 2.2UH 10.9A 4.5 MOHM", Case/Package=Nonstandard, Current Rating=10.9A, DC Resistance (DCR)=4.5mR, Inductance=2.2uH, Inductance Tolerance=20%, Manufacturer="Eaton Cooper", Max Operating Temperature=125°C, Min Operating Temperature=-40°C, Package Quantity=600, Saturation Current=15A, Self Resonant Frequency=100kHz, Supplier Part Number 1=513-1662-6-ND, ComponentLink1Description=https://www.verical.com/server-webapp/html/getDatasheet?partID=571249&src-supplier=Verical, ComponentLink1URL=https://www.verical.com/server-webapp/html/getDatasheet?partID=571249&src-supplier=Verical, ComponentLink2Description=http://uk.rs-online.com/webdocs/116a/0900766b8116a153.pdf?src-supplier=RSComponents, ComponentLink2URL=http://uk.rs-online.com/webdocs/116a/0900766b8116a153.pdf?src-supplier=RSComponents, ComponentLink3Description=http://www.farnell.com/datasheets/87246.pdf?src-supplier=Element14, ComponentLink3URL=http://www.farnell.com/datasheets/87246.pdf?src-supplier=Element14, Composition=Wirewound, Core Material=Ferrite, DC Current=10.9A, Depth=12.5mm, Height=6mm, Height - Seated (Max)=0.236inch, Lead Free="Lead Free", Length=12.5mm, Manufacturer Part Number=DR125-2R2-R, Max DC Current=10.9A, Military Standard=Not, Mount="Surface Mount", Number of Pins=2, Packaging="Tape and Reel", Pricing 1="1=2.03, 10=1.873, 100=1.3113 (USD)", Radiation Hardening=No, REACH SVHC="No SVHC", RMS Current (Irms)=10.9A, Shielding=Shielded, Stock 1=508, Supplier 1=Digi-Key, Termination=SMD/SMT, Test Frequency=100kHz, Tolerance=20%, Weight=0.144oz, Width=0.492inch
Q1 Q2: "MOSFET 2N-CH 30V 5.8A 8-SOIC", Case/Package=SO, Continuous Drain Current (ID)=5.8A, Drain to Source Resistance=9.3mR, Drain to Source Voltage (Vdss)=30V, Gate to Source Voltage (Vgs)=20V, Manufacturer="Vishay Siliconix", Max Operating Temperature=150°C, Max Power Dissipation=1.25W, Min Operating Temperature=-55°C, On-State Resistance=18.5mR, Package Quantity=1, Supplier Part Number 1=SI4816BDY-T1-GE3DKR-ND, Threshold Voltage=3V, ComponentLink1Description=http://www.farnell.com/datasheets/1911984.pdf?src-supplier=Element14, ComponentLink1URL=http://www.farnell.com/datasheets/1911984.pdf?src-supplier=Element14, ComponentLink2Description=http://www.farnell.com/datasheets/2049212.pdf?src-supplier=Element14, ComponentLink2URL=http://www.farnell.com/datasheets/2049212.pdf?src-supplier=Element14, ComponentLink3Description=http://www.vishay.com/docs/73026/si4816bd.pdf?src-supplier=Future+Electronics, ComponentLink3URL=http://www.vishay.com/docs/73026/si4816bd.pdf?src-supplier=Future+Electronics, ComponentLink4Description=http://www.vishay.com/docs/73026/si4816bd.pdf?src-supplier=Digi-Key, ComponentLink4URL=http://www.vishay.com/docs/73026/si4816bd.pdf?src-supplier=Digi-Key, ComponentLink5Description=http://www.vishay.com/docs/73026/si4816bd.pdf?src-supplier=Avnet, ComponentLink5URL=http://www.vishay.com/docs/73026/si4816bd.pdf?src-supplier=Avnet, ComponentLink6Description=http://datasheet.iiic.cc/vishay_[siliconix]/SI4816BDY-T1-GE3.pdf?src-supplier=IIIC, ComponentLink6URL=http://datasheet.iiic.cc/vishay_[siliconix]/SI4816BDY-T1-GE3.pdf?src-supplier=IIIC, Contact Plating=Tin,Matte, Fall Time=9ns, FET Type="2 N-Channel", Height=1.55mm, Lead Free="Lead Free", Length=5mm, Manufacturer Part Number=SI4816BDY-T1-GE3, Mount="Surface Mount", Number of Channels=2, Number of Elements=2, Number of Pins=8, Packaging="Tape and Reel", Pricing 1="1=1.56, 10=1.405, 25=1.3252, 100=1.0335, 250=1.007, 500=0.8745, 1000=0.742 (USD)", Radiation Hardening=No, Rds On Max=18.5mR, REACH SVHC="No SVHC", Rise Time=9ns, Stock 1=4612, Supplier 1=Digi-Key, Turn-Off Delay Time=31ns, Turn-On Delay Time=13ns, Weight=0.006596oz, Width=4mm
R1 R2 R13 R15: library part AC0805JR-070RL, "Thick Film Resistors - SMD 1/8W 0.0ohm 5%", Case/Package=0805, Case Code (Metric)=2012, Manufacturer=Yageo, Max Operating Temperature=155°C, Max Power Dissipation=125mW, Min Operating Temperature=-55°C, Resistance=0mR, Supplier Part Number 1=YAG3755DKR-ND, Temperature Coefficient=200ppm/°C, Tolerance=5%, Voltage Rating=150V, Case Code (Imperial)=0805, ComponentLink1Description=http://www.yageo.com/documents/recent/PYu-AC_51_RoHS_L_2.pdf?src-supplier=Mouser, ComponentLink1URL=http://www.yageo.com/documents/recent/PYu-AC_51_RoHS_L_2.pdf?src-supplier=Mouser, ComponentLink2Description=http://www.yageo.com/NewPortal/yageodocoutput?fileName=/pdf/R-Chip/PYu-AC_51_RoHS_L_6.pdf&src-supplier=Digi-Key, ComponentLink2URL=http://www.yageo.com/NewPortal/yageodocoutput?fileName=/pdf/R-Chip/PYu-AC_51_RoHS_L_6.pdf&src-supplier=Digi-Key, Composition="Thick Film", Features="Moisture Resistant,Automotive AEC-Q200", Height=0.024inch, Lead Free="Lead Free", Length=0.079inch, Manufacturer Part Number=AC0805JR-070RL, Number of Terminations=2, Packaging="Tape and Reel", Power Rating=125mW, Pricing 1="1=0.1, 10=0.041, 25=0.0296, 50=0.0226, 100=0.0167, 250=0.01272, 500=0.01018, 1000=0.0075 (USD)", Stock 1=15680, Supplier 1=Digi-Key, Termination=SMD/SMT, Width=1.25mm
R3: library part AC0805FR-0710RL, "Res Thick Film 0805 10 Ohm 1% 0.125W(1/8W) ±200ppm/C Sulfur Resistant Molded SMD Automotive Paper T/R", Case/Package=0805, Case Code (Metric)=2012, Manufacturer=Yageo, Max Operating Temperature=155°C, Max Power Dissipation=125mW, Min Operating Temperature=-55°C, Supplier Part Number 1=YAG3690DKR-ND, Temperature Coefficient=200ppm/°C, Tolerance=1%, Voltage Rating=150V, Case Code (Imperial)=0805, ComponentLink1Description=http://www.mouser.com/ds/2/447/yageodocoutput-1111992.pdf?src-supplier=Mouser, ComponentLink1URL=http://www.mouser.com/ds/2/447/yageodocoutput-1111992.pdf?src-supplier=Mouser, ComponentLink2Description=http://www.yageo.com/NewPortal/yageodocoutput?fileName=/pdf/R-Chip/PYu-AC_51_RoHS_L_6.pdf&src-supplier=Digi-Key, ComponentLink2URL=http://www.yageo.com/NewPortal/yageodocoutput?fileName=/pdf/R-Chip/PYu-AC_51_RoHS_L_6.pdf&src-supplier=Digi-Key, ComponentLink3Description=http://www.yageo.com/documents/recent/PYu-AC_51_RoHS_L_2_revised.pdf?src-supplier=Future+Electronics, ComponentLink3URL=http://www.yageo.com/documents/recent/PYu-AC_51_RoHS_L_2_revised.pdf?src-supplier=Future+Electronics, ComponentLink4Description=http://components.arrow.com/part/dataview/0323_03350463?src-supplier=Arrow+Europe, ComponentLink4URL=http://components.arrow.com/part/dataview/0323_03350463?src-supplier=Arrow+Europe, Composition="Thick Film", Depth=1.25mm, Features="Moisture Resistant,Automotive AEC-Q200", Height=0.024inch, Lead Free="Lead Free", Length=2mm, Manufacturer Part Number=AC0805FR-0710RL, Military Standard=Not, Number of Terminations=2, Packaging="Tape and Reel", Power Rating=125mW, Pricing 1="1=0.1, 10=0.086, 100=0.0333, 1000=0.01463, 2500=0.01264 (USD)", Resistance=10R, Stock 1=0, Supplier 1=Digi-Key, Termination=SMD/SMT, Width=1.25mm
R4 R5: library part AC0805FR-071RL, "RES SMD 1 OHM 1% 1/8W 0805", Case/Package=0805, Case Code (Metric)=2012, Manufacturer=Yageo, Max Operating Temperature=155°C, Max Power Dissipation=125mW, Min Operating Temperature=-55°C, Supplier Part Number 1=YAG3705DKR-ND, Temperature Coefficient=200ppm/°C, Tolerance=1%, Voltage Rating=150V, Case Code (Imperial)=0805, ComponentLink1Description=http://www.mouser.com/ds/2/447/yageodocoutput-1111992.pdf?src-supplier=Mouser, ComponentLink1URL=http://www.mouser.com/ds/2/447/yageodocoutput-1111992.pdf?src-supplier=Mouser, Composition="Thick Film", Features="Moisture Resistant,Automotive AEC-Q200", Height=0.024inch, Lead Free="Lead Free", Length=0.079inch, Manufacturer Part Number=AC0805FR-071RL, Number of Terminations=2, Packaging="Tape and Reel", Power Rating=125mW, Pricing 1="1=0.1, 10=0.086, 100=0.0333, 1000=0.01463, 2500=0.01264 (USD)", Resistance=1R, Stock 1=16410, Supplier 1=Digi-Key, Termination=SMD/SMT, Weight=0.000194oz, Width=0.049inch
R6 R7 R9 R10: library part AC0805FR-07200KL, "Res Thick Film 0805 200K Ohm 1% 0.125W(1/8W) ±100ppm/C Epoxy Pad SMD Automotive T/R", Case/Package=0805, Case Code (Metric)=2012, Manufacturer=Yageo, Max Operating Temperature=155°C, Max Power Dissipation=125mW, Min Operating Temperature=-55°C, Resistance=200kR, Supplier Part Number 1=YAG3706DKR-ND, Temperature Coefficient=100ppm/°C, Tolerance=1%, Voltage Rating=150V, Case Code (Imperial)=0805, ComponentLink1Description=http://www.yageo.com/NewPortal/yageodocoutput?fileName=/pdf/R-Chip/PYu-AC_51_RoHS_L_6.pdf&src-supplier=Digi-Key, ComponentLink1URL=http://www.yageo.com/NewPortal/yageodocoutput?fileName=/pdf/R-Chip/PYu-AC_51_RoHS_L_6.pdf&src-supplier=Digi-Key, ComponentLink2Description=http://www.yageo.com/documents/recent/PYu-AC_51_RoHS_L_2.pdf?src-supplier=Future+Electronics, ComponentLink2URL=http://www.yageo.com/documents/recent/PYu-AC_51_RoHS_L_2.pdf?src-supplier=Future+Electronics, ComponentLink3Description=http://www.mouser.com/ds/2/447/yageodocoutput-1111992.pdf?src-supplier=Mouser, ComponentLink3URL=http://www.mouser.com/ds/2/447/yageodocoutput-1111992.pdf?src-supplier=Mouser, Composition="Thick Film", Features="Moisture Resistant,Automotive AEC-Q200", Height=0.024inch, Lead Free="Lead Free", Length=0.079inch, Manufacturer Part Number=AC0805FR-07200KL, Number of Terminations=2, Packaging="Tape and Reel", Power Rating=125mW, Pricing 1="1=0.1, 10=0.048, 100=0.0197, 1000=0.00885, 2500=0.00768 (USD)", Stock 1=15718, Supplier 1=Digi-Key, Termination=SMD/SMT, Width=0.049inch
R8 R11: library part AC0805FR-0710KL, "RES SMD 10K OHM 1% 1/8W 0805", Case/Package=0805, Case Code (Metric)=2012, Manufacturer=Yageo, Max Operating Temperature=155°C, Max Power Dissipation=125mW, Min Operating Temperature=-55°C, Package Quantity=1, Resistance=10kR, Supplier Part Number 1=311-10KLGDKR-ND, Temperature Coefficient=100ppm/°C, Tolerance=1%, Voltage Rating=150V, Case Code (Imperial)=0805, ComponentLink1Description=http://www.yageo.com/NewPortal/yageodocoutput?fileName=/pdf/R-Chip/PYu-AC_51_RoHS_L_6.pdf&src-supplier=Mouser, ComponentLink1URL=http://www.yageo.com/NewPortal/yageodocoutput?fileName=/pdf/R-Chip/PYu-AC_51_RoHS_L_6.pdf&src-supplier=Mouser, Composition="Thick Film", Depth=1.25mm, Features="Moisture Resistant,Automotive AEC-Q200,Anti-Sulfur", Height=0.024inch, Lead Free="Lead Free", Length=0.079inch, Manufacturer Part Number=AC0805FR-0710KL, Military Standard=Not, Number of Terminations=2, Packaging="Tape and Reel", Power Rating=125mW, Pricing 1="1=0.1, 10=0.048, 100=0.0197, 1000=0.00885, 2500=0.00768 (USD)", Stock 1=552255, Supplier 1=Digi-Key, Termination=SMD/SMT, Width=0.049inch
R12 R14 R16 R17 R18: library part RES
U1: "IC MAIN PWR CTRLR QUAD 32-QFN", Case/Package=QFN, Manufacturer=Intersil, Max Operating Temperature=100°C, Min Operating Temperature=-40°C, Output Current=20A, Package Quantity=60, Supplier Part Number 1=ISL6236AIRZ-ND, Switching Frequency=500kHz, ComponentLink1Description=http://www.intersil.com/content/dam/Intersil/documents/isl6/isl6236a.pdf?src-supplier=Avnet+Europe, ComponentLink1URL=http://www.intersil.com/content/dam/Intersil/documents/isl6/isl6236a.pdf?src-supplier=Avnet+Europe, Height=0.95mm, Lead Free="Lead Free", Length=5mm, Manufacturer Part Number=ISL6236AIRZ, Mount="Surface Mount", Number of Outputs=2, Packaging=Rail/Tube, Pricing 1="600=3.68 (USD)", Radiation Hardening=No, Stock 1=0, Supplier 1=Digi-Key, Width=5mm

## Via types
v1: diameter 0.6, hole 0.3, L1 to L6, tented both sides, 100 vias

## Nets (pads, with @x,y where several pads share a name; then routed paths per layer and width w, separated by ;. In a path a pad name is that pad's centre, name@x,y a point inside that pad or via, vN(x,y) a via of type N, cw(c..) or ccw(c..) an arc to the next point about the centre after c; other vN are vias at no path point)
+1V5: C9.1 J3.1 L1.1 R12.2 U1.10 | length 18.5
  L3 w1: v1(30.75,19.55) 31.936,19.55 32.936,18.55 34.32,18.55 38.65,14.22 v1(38.65,11.88)
  L6 w0.2: U1.10 26.25,22.084 26.764,21.57 27.36,21.57 27.47,21.46
  L6 w0.5: 27.47,21.46 29.37,19.56 v1@30.72,19.56
+1V05: C10.1 J4.1 L2.2 U1.30 | length 19.1
  L3 w1: v1(25.6,29) 25.6,30.325 31.535,36.26 36.78,36.26 v1(38.55,38.03)
  L6 w0.2: v1(25.6,29) 25.75,28.85 U1.30 U1.30@25.76,27.41
+5V_LDO: C1.2 R1.2 U1.7 | length 25.6
  L3 w1: v1(12,25) 12,24.99 12.44,24.55 20.886,24.55 20.916,24.52 22.07,24.52 22.4,24.85 28.11,24.85 v1(29.95,23.01)
  L6 w0.2: U1.7 28.15,23.75 28.7,23.2
  L6 w0.5: v1(12,25) R1.2 ; 28.7,23.2 28.7,22.2 29.2,21.7 ; 29.3,21.66 29.85,21.66 C1.2 v1(29.95,23.01)
+5V_PVCC: C3.2 R1.1 R2.2 R3.2 U1.19 | length 13
  L6 w0.2: 21.52,24.25 U1.19
  L6 w0.5: R1.1 15.25,25.7 19.3,25.7 19.55,25.45 C3.2 20.7,24.6 21.05,24.25 21.52,24.25
  L6 w0.7: 15.25,25.7 R3.2@15.25,29.55
+5V_VCC: C4.2 R3.1 R8.2 R9.2 R10.2 R11.2 R13.2 R16.1 U1.2 U1.3 U1.20 | length 19.1
  L6 w0.2: v1(21.33,25.52) 21.33,25.1 21.63,24.8 22.55,24.8 U1.20 ; U1.3 27.95,25.75 28.7,26.5 ; U1.2 27.85,26.25 28.05,26.45 v1(28.05,27.27)
  L6 w0.5: v1(12,29.6) R3.1 ; v1(12,32.8) R10.2 ; v1(12,35.1) R9.2 ; v1(22.7,16.3) R11.2 ; v1(27.34,37.15) 27.34,36.01 R16.1 ; v1(27.4,16.3) R13.2 ; 28.7,26.5 28.8,26.6 28.8,27.562 29.298,28.06 29.3,28.06 30.15,28.91 C4.2 v1(30.15,31.11) ; v1(28.95,35.91) 29.9,35.91 R8.2
+REF: C12.1 R14.2 U1.1 | length 10.9
  L6 w0.2: U1.1 27.4,27.67
  L6 w0.5: R14.2 30.11,33.7 C12.1 30.15,32.6 28.2,30.65 28.2,29.17 27.395,28.365 27.395,27.675
+VIN: C2.2 C5.2 C6.2 J1.1 Q1.8 Q2.8 R2.1 U1.6 | length 7.3
  L6 w0.2: U1.6 28.54,24.25
  L6 w0.5: v1(11.5,28.5) 11.5,28 12.2,27.3 R2.1 ; 28.54,24.25 28.83,23.96 29.75,23.96 C2.2 30.05,24.93 30.44,25.32 v1(30.99,25.32)
+VREF3: C11.1 R15.2 U1.5 | length 27.4
  L6 w0.2: U1.5 27.45,24.8 28.768,24.8 28.77,24.798 29.069,25.096 29.146,25.096
  L6 w0.5: R15.2 R15.2@27.64,38.3 ; 29.146,25.096 30.1,26.05 C11.1
  L6 w0.9: R15.2@27.64,38.3 27.65,38.31 34.35,38.31 35.6,37.06 35.6,28.75 34.75,27.9 31.181,27.9 30.1,26.819 C11.1
EN1: R11.1 U1.14 | length 3.7
  L6 w0.2: R11.1 22.7,20.2 24.25,21.75 U1.14
EN_LDO: R8.1 U1.4 | length 18.1
  L6 w0.2: U1.4 28.35,25.25 29.35,26.25 29.35,27.334 29.526,27.51 29.528,27.51 30.7,28.682 30.7,28.7 30.75,28.75 33.62,28.75 34.47,29.6 34.47,35.09 33.56,36 R8.1@31.75,36
FB1: R12.1 R13.1 R17.2 U1.11 | length 9.9
  L6 w0.2: U1.11@25.74,22.59 U1.11 25.75,21.73 26.02,21.46
  L6 w0.5: 26.02,21.4 26.265,21.155 27.4,20.02 R13.1 28.25,19.55 28.6,19.2 28.6,17.85 28.8,17.65 R12.1 R17.2
GND: C1.1 C2.1 C3.1 C4.1 C5.1 C6.1 C9.2 C10.2 C11.2 C12.2 J2.1 J5.1 J6.1 Q1.2 Q1.3 Q2.2 Q2.3 R6.2 R7.1 R17.1 R18.2 U1.8 U1.21 U1.22 U1.29 U1.33 | length 14.3
  L6 w0.2: U1.21 U1.33@24.75,25.25 ; U1.22 24.25,25.75 U1.33@24.75,25.25 ; v1@24.333,29.8 v1(24.4,29.8) 24.4,29.027 25.25,28.177 U1.29 ; U1.33 U1.33@24.75,25.25 ; U1.8 27.4,22.5 v1(27.7,22.2)
  L6 w0.5: v1(24.45,31.75) R6.2 ; v1(25,16.3) R7.1 ; R18.2 v1(28.7,40.6) ; R17.1 v1(33.35,19.55)
  other v1: 9.5,8.5 11,8.5 8.5,9.5 10.5,9.5 9.5,10.5 11,10.5 8.5,11.5 10.5,11.5 9.5,12.5 8.5,13.5 9.5,14.5 10.4,14.5 8.5,15.5 10.4,15.5 36.9,18.5 40.3,18.5 14,19.1 14,20 14,20.9 40.3,20.9 36.9,21 34,21.4 34,22.1 37.7,22.1 39.4,22.1 17.3,23.54 18,23.54 23.97,23.85 26.09,23.85 32.9,23.9 32.9,24.6 23.97,26.08 26.09,26.08 32.95,26.2 32.95,26.9 37.8,27.9 39.5,27.9 40.3,29 36.9,29.1 33,29.4 33,30.1 36.9,31.5 40.3,31.5 9.5,32.5 11,32.5 31.7,32.6 32.4,32.6 8.5,33.5 10.5,33.5 9.5,34.5 11,34.5 8.5,35.5 10.5,35.5 9.5,36.5 8.5,37.5 9.5,38.5 10.4,38.5 8.5,39.5 10.4,39.5 19.2,43.1 19.2,44 19.2,44.9
LGATE1: Q1.4 U1.18 | length 21.5
  L1 w0.5: Q1.4@12.173,13.095 v1(13.595,13.095)
  L3 w1: v1(13.595,13.095) 12.05,14.64 12.05,20.79 13.33,22.07 19.64,22.07 v1(20.7,23.13)
  L6 w0.2: v1(20.7,23.13) 20.73,23.13 21.117,23.517 21.13,23.53 22.006,23.53 22.226,23.75 U1.18
LGATE2: Q2.4 U1.23 | length 18.5
  L1 w0.5: Q2.4@12.173,37.095 v1(13.595,37.095)
  L3 w1: v1(13.595,37.095) 14.06,36.63 14.06,30.44 17.96,26.54 v1(21.4,26.54)
  L6 w0.2: v1(21.4,26.54) 21.69,26.25 U1.23
NetC7_2: C7.2 R4.1 | length 2.4
  L6 w0.2: C7.2 17.65,21.06 17.85,21.26 R4.1
NetC8_1: C8.1 R5.2 | length 2.5
  L6 w0.2: C8.1 17.65,28.31 17.85,28.11 R5.2
NetR4_2: R4.2 U1.17 | length 3.2
  L6 w0.2: R4.2 21.341,22.3 22.291,23.25 U1.17
NetR5_1: R5.1 U1.24 | length 3.1
  L6 w0.2: R5.1 20.551,26.9 20.791,27.14 21.649,27.14 22.039,26.75 U1.24
NetR6_1: R6.1 U1.31 | length 2.8
  L6 w0.2: R6.1 25.919,29.731 26.15,29.731 26.15,29.299 26.2,29.249 26.2,28.556 26.15,28.506 26.15,27.862 26.24,27.772 26.24,27.41 U1.31
NetR7_2: R7.2 U1.12 | length 3.2
  L6 w0.2: R7.2 25,20.2 25.25,20.45 U1.12
PHASE1: C7.1 L1.2 Q1.5 Q1.6 Q1.7 U1.16 | length 12.5
  L3 w1: v1(19,13.095) 19.55,13.645 v1(19.55,18.25)
  L6 w0.2: 22.6,22.6 U1.16
  L6 w0.5: v1(19.55,18.25) C7.1 21.08,20 22.28,21.2 22.28,22.28 22.6,22.6
PHASE2: C8.2 L2.1 Q2.5 Q2.6 Q2.7 U1.25 | length 14.1
  L3 w1: v1(19.5,37.095) 21.42,35.175 21.42,32.92 v1(19.55,31.05)
  L6 w0.2: 22.79,27.4 U1.25
  L6 w0.5: v1(19.55,31.05) C8.2 20.7,29.3 20.9,29.1 20.9,28.7 22.2,27.4 22.79,27.4
POK1: R10.1 U1.13 U1.27 | length 38.7
  L3 w0.2: v1(22.23,30.94) 22.53,30.94 22.96,30.51 22.96,29.11 25.25,26.82 27.01,26.82 27.28,26.55 31.1,26.55 31.99,25.66 31.99,22.32 30.32,20.65 v1(24.45,20.65)
  L6 w0.2: R10.1 20.4,32.8 22.23,30.97 v1(22.23,30.94) 22.51,30.94 22.98,30.47 22.98,29.124 22.986,29.124 24.25,27.86 U1.27 ; v1(24.45,20.65) 24.75,20.95 U1.13
POK2: R9.1 U1.28 | length 15.2
  L6 w0.2: R9.1 21.3,35.1 23.5,32.9 23.5,29.18 24.75,27.93 U1.28
REFIN2: R14.1 R15.1 R16.2 R18.1 U1.32 | length 14.6
  L6 w0.2: U1.32 26.75,28.91
  L6 w0.5: R18.1 R15.1 R14.1 25.45,32.95 25.8,32.6 26.8,32.6 27.14,32.26 27.14,29.3 26.75,28.91
UGATE1: Q1.1 U1.15 | length 14.4
  L1 w0.5: Q1.1@12.173,16.905 v1(13.595,16.905)
  L3 w1: v1(13.595,16.905) 16.67,19.98 21.56,19.98 v1(23.03,21.45)
  L6 w0.2: v1(23.03,21.45) 23.03,21.49 23.13,21.39 23.75,22.01 U1.15
UGATE2: Q2.1 U1.26 | length 26
  L1 w0.5: v1(10.4,40.9) Q2.1@12.228,40.9 ; Q2.1@12.098,40.88 12.148,40.93 Q2.1@12.173,40.905
  L3 w1: v1(10.4,40.9) 15.65,40.9 ; 15.52,40.88 15.57,40.93 17.9,38.6 17.9,30.5 19.46,28.94 v1(21.9,28.94)
  L6 w0.2: v1(21.9,28.94) 22.55,28.94 23.03,28.46 23.489,28.001 ; 23.489,28 23.75,27.739 U1.26
pads on no net: U1.9

## Polygon pours and split planes (outlines as drawn)
GND on L1 "VCC" (solid, pour order 58): 13,16 8.5,16 8,15.5 8,8.65 8.51,8.14 11.49,8.14 11.49,12.3 10.8,12.3 10.55,12.55 10.55,13.65 10.9,14 13,14
+1V05 on L1 "VCC" (solid, pour order 12): 47.98,33.66 29.89,33.66 29.89,40.03 29.93,40.07 29.94,40.06 34.29,40.06 35.93,38.42 47.98,38.42
GND on L1 "VCC" (solid, pour order 50): 13,40 8.5,40 8,39.5 8,32.65 8.51,32.14 11.49,32.14 11.49,36.3 10.8,36.3 10.55,36.55 10.55,37.65 10.9,38 13,38
GND on L1 "VCC" (solid, pour order 36): 40.8,17.7 36.5,17.7 36.5,22.5 40.8,22.5
GND on L1 "VCC" (solid, pour order 34): 36.4,32.3 40.7,32.3 40.7,27.5 36.4,27.5
GND on L1 "VCC" (solid, pour order 30): 15.6,21.3 15.6,18.7 13.6,18.7 13.6,21.3
GND on L1 "VCC" (solid, pour order 28): 17.6,42.7 17.6,45.3 19.6,45.3 19.6,42.7
+VIN on L1 "VCC" (solid, pour order 22): 17.5,26.5 19.5,24.5 19.5,16.5 16,16.5 16,21.5 15,22.5 3,22.5 2,23.5 2,46.5 3,47.5 15.5,47.5 16.5,46.5 16.5,42.7 17.1,42.1 18.74,42.1 18.74,40.5 14.5,40.5 13,42 8.4,42 7.6,41.2 7.6,32.5 8.32,31.78 30.72,31.78 32.5,30 32.5,24.5 29,24.5 29,27.5 28.3,28.2 7.774,28.2 7.4,27.895 7.4,26.9 7.8,26.5
+1V5 on L1 "VCC" (solid, pour order 10): 47.98,16.34 29.89,16.34 29.89,9.97 29.93,9.93 29.94,9.94 34.29,9.94 35.93,11.58 47.98,11.58
PHASE1 on L1 "VCC" (solid, pour order 6): 16.48,15.99 16.49,16 24.39,16 24.39,10.13 24.37,10.11 24.36,10.12 18.94,10.12 16.47,12.59 16.47,15.96
PHASE2 on L1 "VCC" (solid, pour order 4): 16.52,39.97 16.53,39.96 24.36,39.96 24.36,34.12 24.38,34.1 19.28,34.1 16.51,36.87 16.52,36.88
GND on L6 "VCC" (solid, pour order 48): 16.9,23.14 16.9,25.34 18.4,25.34 18.4,23.14
GND on L6 "VCC" (solid, pour order 46): 34.4,22.6 34.4,20.9 32.5,20.9 32.5,22.6
GND on L6 "VCC" (solid, pour order 44): 33.3,25 33.3,23.5 31.4,23.5 31.4,25
GND on L6 "VCC" (solid, pour order 42): 33.35,27.3 33.35,25.8 31.45,25.8 31.45,27.3
GND on L6 "VCC" (solid, pour order 40): 33.4,30.5 33.4,29 31.5,29 31.5,30.5
GND on L6 "VCC" (solid, pour order 38): 31.3,32.2 31.3,34.4 32.8,34.4 32.8,32.2
+5V_VCC on L4 "VCC" (solid, pour order 54): 7.5,5 42.5,5 42.5,45 7.5,45
GND on L2 (split plane): 49.49,0.51 0.51,0.51 0.51,49.49 49.49,49.49
GND on L5 (split plane): 49.49,0.51 0.51,0.51 0.51,49.49 49.49,49.49

## Silkscreen, mask and mechanical layers (free items; w line width, h text height)
Top Overlay:
  text "+OUT2" at 41.35,39.04 h1.52
  text "+VIN" at 2.04,32.73 h1.52
  text "GND" at 43.14,25.96 h1.52
  text "GND" at 43.11,22.3 h1.52
  text "GND" at 2.98,15.82 h1.52
  text "+OUT1" at 41.29,9.82 h1.52
Bottom Overlay:
  text "ISL6236A DEMO V1I1" at 42,46 h2
  text "1" at 28.68,26.59 h0.9
Board Outline:
  the board outline again, w0.5
Documentation:
  lines w0.381: 53.973,4.856 64.384,4.856 88,4.856 109.838,4.856 126.344,4.856 ; 53.973,7.904 64.384,7.904 88,7.904 109.838,7.904 126.344,7.904 ; 53.973,10.952 64.384,10.952 88,10.952 109.838,10.952 126.344,10.952 ; 53.973,14 64.384,14 88,14 109.838,14 126.344,14 ; 53.973,17.048 64.384,17.048 88,17.048 109.838,17.048 126.344,17.048 ; 53.973,20.096 64.384,20.096 88,20.096 109.838,20.096 126.344,20.096 ; 53.973,23.144 64.384,23.144 88,23.144 109.838,23.144 126.344,23.144 ; 53.973,26.192 64.384,26.192 88,26.192 109.838,26.192 126.344,26.192 ; 53.973,29.24 64.384,29.24 88,29.24 109.838,29.24 126.344,29.24 ; 53.973,32.288 64.384,32.288 88,32.288 109.838,32.288 126.344,32.288 ; 53.973,35.336 64.384,35.336 88,35.336 109.838,35.336 126.344,35.336 ; 53.973,38.384 64.384,38.384 88,38.384 109.838,38.384 126.344,38.384 ; 53.973,41.432 64.384,41.432 88,41.432 109.838,41.432 126.344,41.432 ; 53.973,44.48 64.384,44.48 88,44.48 109.838,44.48 126.344,44.48 ; 53.973,47.528 126.344,47.528 ; 64.384,50.576 64.384,1.808 ; 88,50.576 88,1.808 ; 109.838,50.576 109.838,1.808 ; 64.384,1.808 88,1.808 ; 64.384,1.808 53.973,1.808 53.973,50.576 126.344,50.576 126.344,1.808 109.838,1.808 ; 88,1.808 109.838,1.808
  text "Layer" at 55.751,48.29 h1.52
  text "Name" at 66.162,48.29 h1.52
  text "Material" at 89.778,48.29 h1.52
  text "Thickness" at 111.616,48.29 h1.52
  text "Top Overlay" at 66.162,45.242 h1.52
  text "Top Solder" at 66.162,42.194 h1.52
  text "Solder Resist" at 89.778,42.194 h1.52
  text "0.010mm" at 111.616,42.194 h1.52
  text "1" at 55.751,39.146 h1.52
  text "L1" at 66.162,39.146 h1.52
  text "Copper" at 89.778,39.146 h1.52
  text "0.035mm" at 111.616,39.146 h1.52
  text "Dielectric 1" at 66.162,36.098 h1.52
  text "FR-4" at 89.778,36.098 h1.52
  text "0.260mm" at 111.616,36.098 h1.52
  text "2" at 55.751,33.05 h1.52
  text "L2" at 66.162,33.05 h1.52
  text "Copper" at 89.778,33.05 h1.52
  text "0.035mm" at 111.616,33.05 h1.52
  text "Dielectric 3" at 66.162,30.002 h1.52
  text "0.360mm" at 111.616,30.002 h1.52
  text "3" at 55.751,26.954 h1.52
  text "L3" at 66.162,26.954 h1.52
  text "Copper" at 89.778,26.954 h1.52
  text "0.035mm" at 111.616,26.954 h1.52
  text "Dielectric 4" at 66.162,23.906 h1.52
  text "0.185mm" at 111.616,23.906 h1.52
  text "4" at 55.751,20.858 h1.52
  text "L4" at 66.162,20.858 h1.52
  text "Copper" at 89.778,20.858 h1.52
  text "0.035mm" at 111.616,20.858 h1.52
  text "Dielectric 5" at 66.162,17.81 h1.52
  text "0.360mm" at 111.616,17.81 h1.52
  text "5" at 55.751,14.762 h1.52
  text "L5" at 66.162,14.762 h1.52
  text "Copper" at 89.778,14.762 h1.52
  text "0.035mm" at 111.616,14.762 h1.52
  text "Dielectric 2" at 66.162,11.714 h1.52
  text "0.260mm" at 111.616,11.714 h1.52
  text "6" at 55.751,8.666 h1.52
  text "L6" at 66.162,8.666 h1.52
  text "Copper" at 89.778,8.666 h1.52
  text "0.035mm" at 111.616,8.666 h1.52
  text "Bottom Solder" at 66.162,5.618 h1.52
  text "Solder Resist" at 89.778,5.618 h1.52
  text "0.010mm" at 111.616,5.618 h1.52
  text "Bottom Overlay" at 66.162,2.57 h1.52

## Text inside footprints (layer, text, board x,y; h text height)
Q1: Top Overlay "1" at 11.2,17.8 h0.9 r270
Q2: Top Overlay "1" at 11.2,41.8 h0.9 r270